# Allegro board pc049a_lemo_db_07.brd
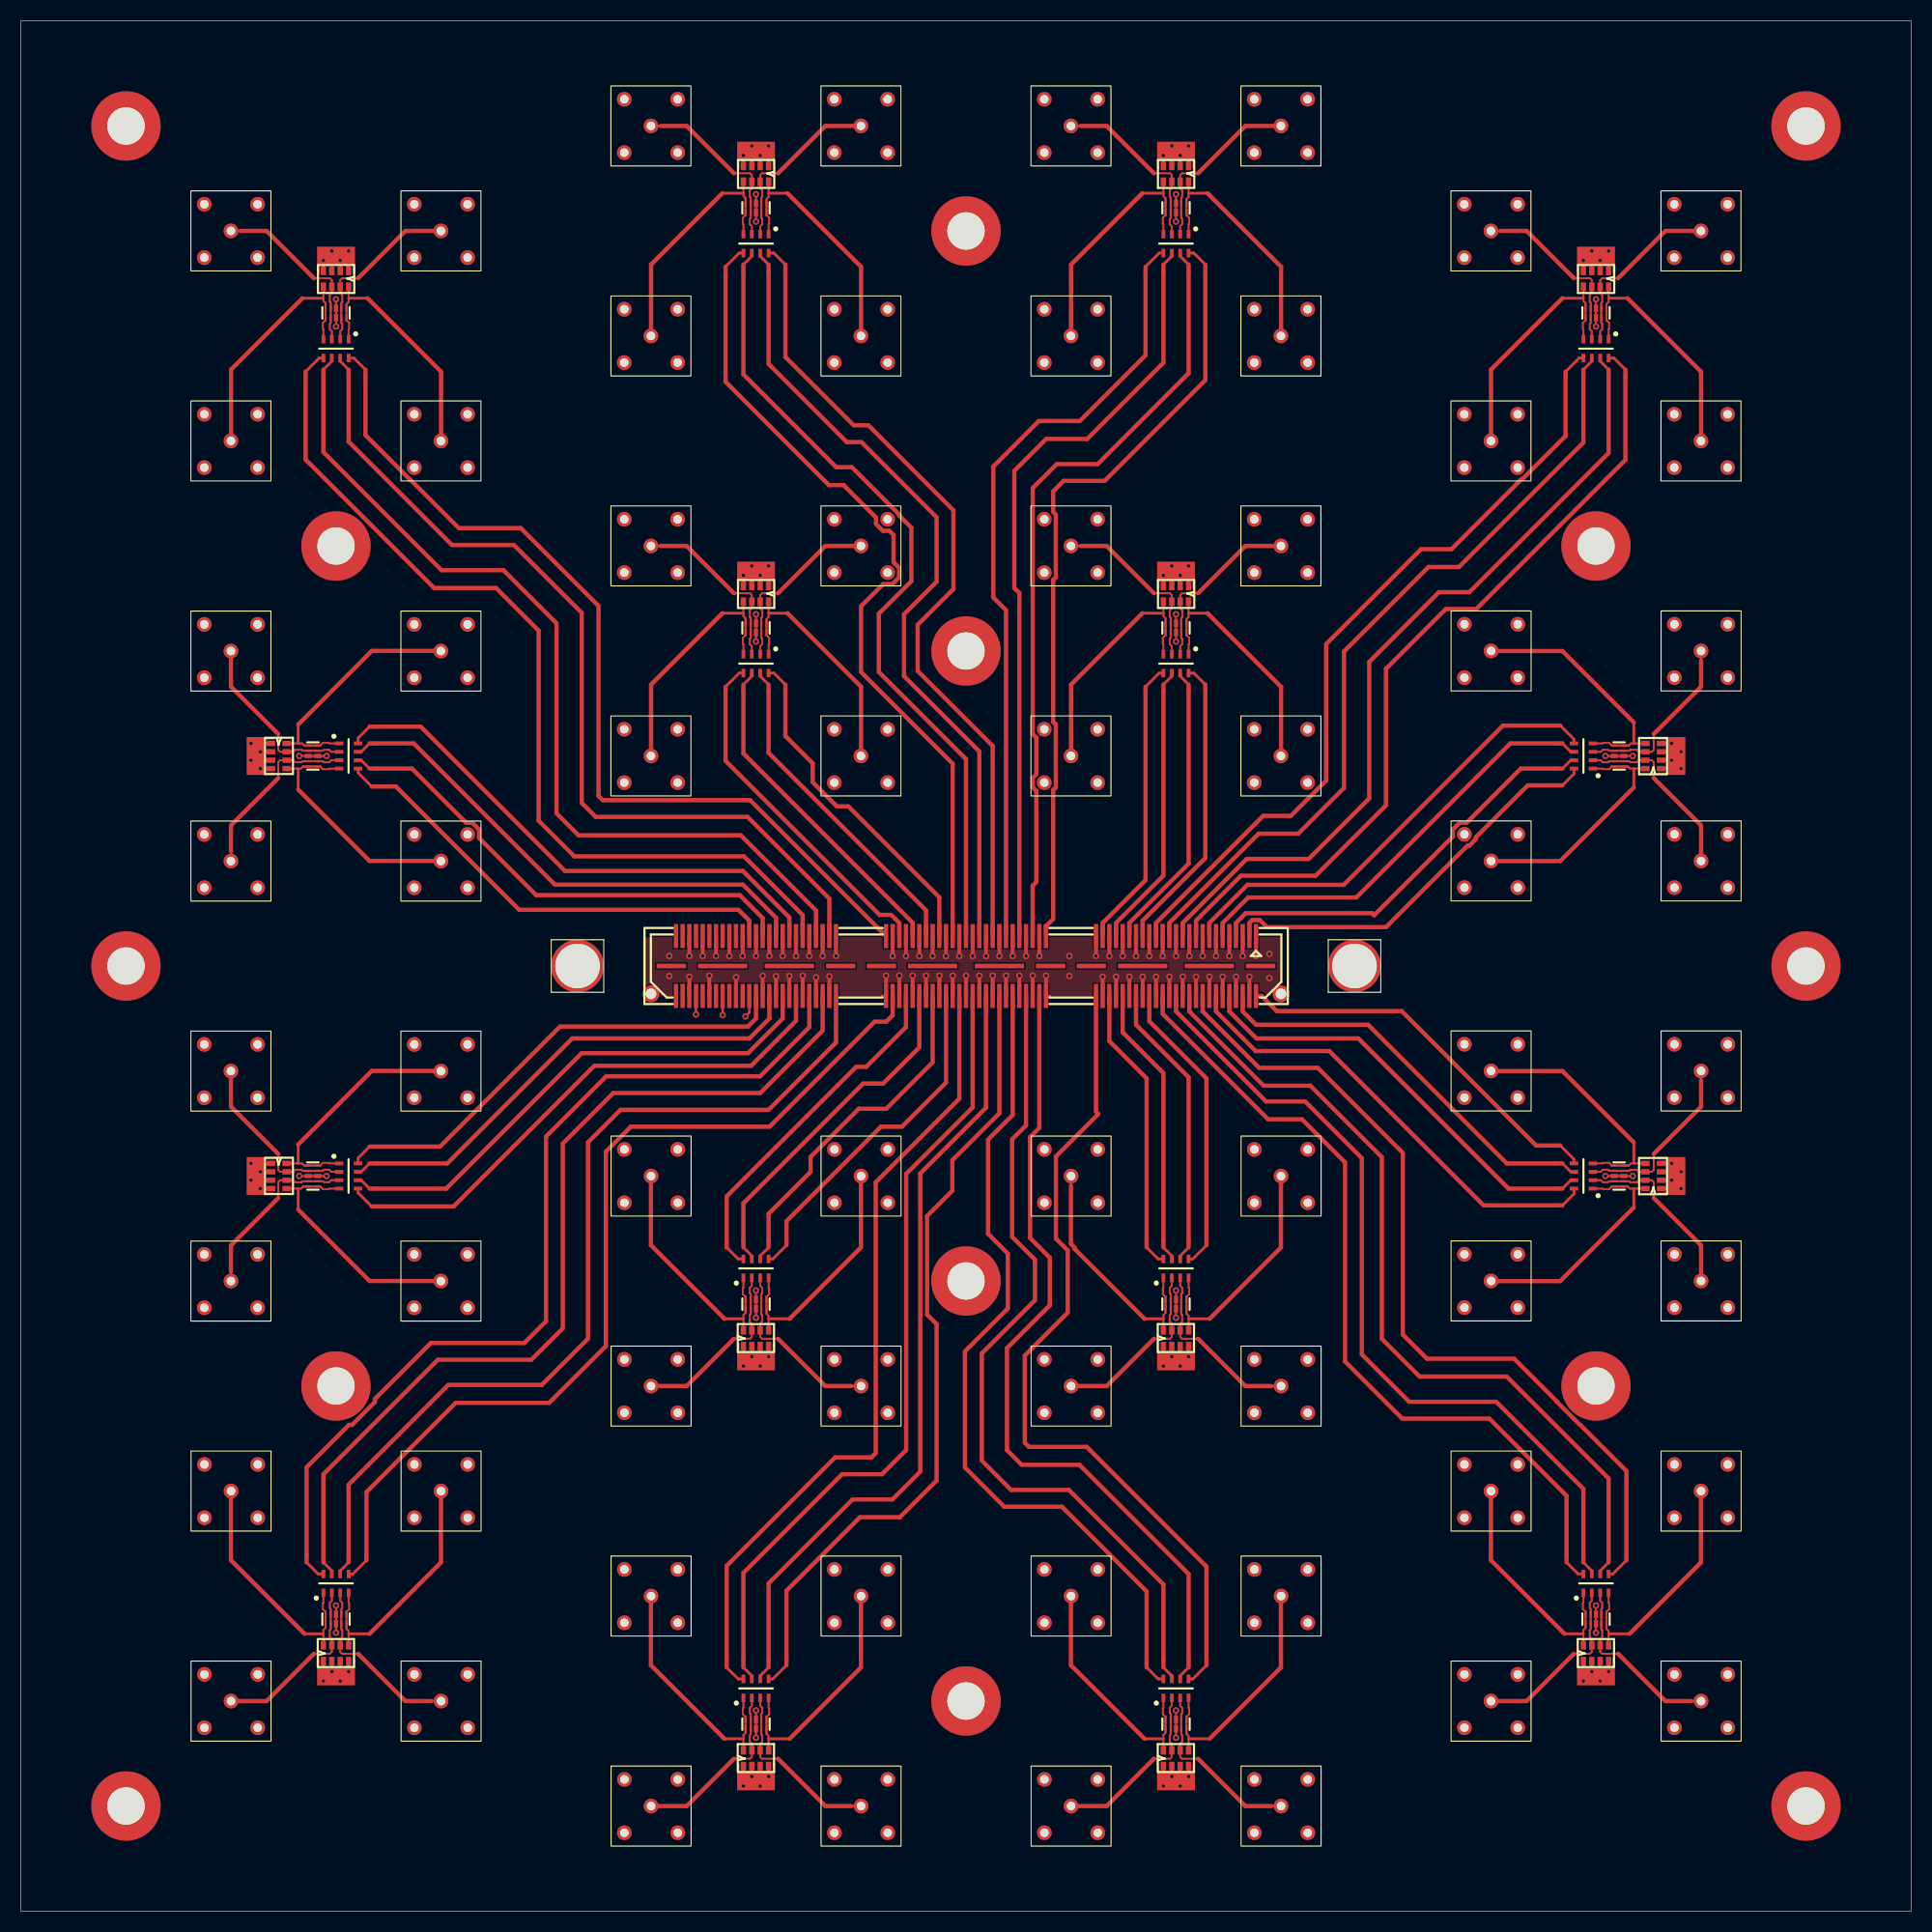
[diagram p0: board, top side]
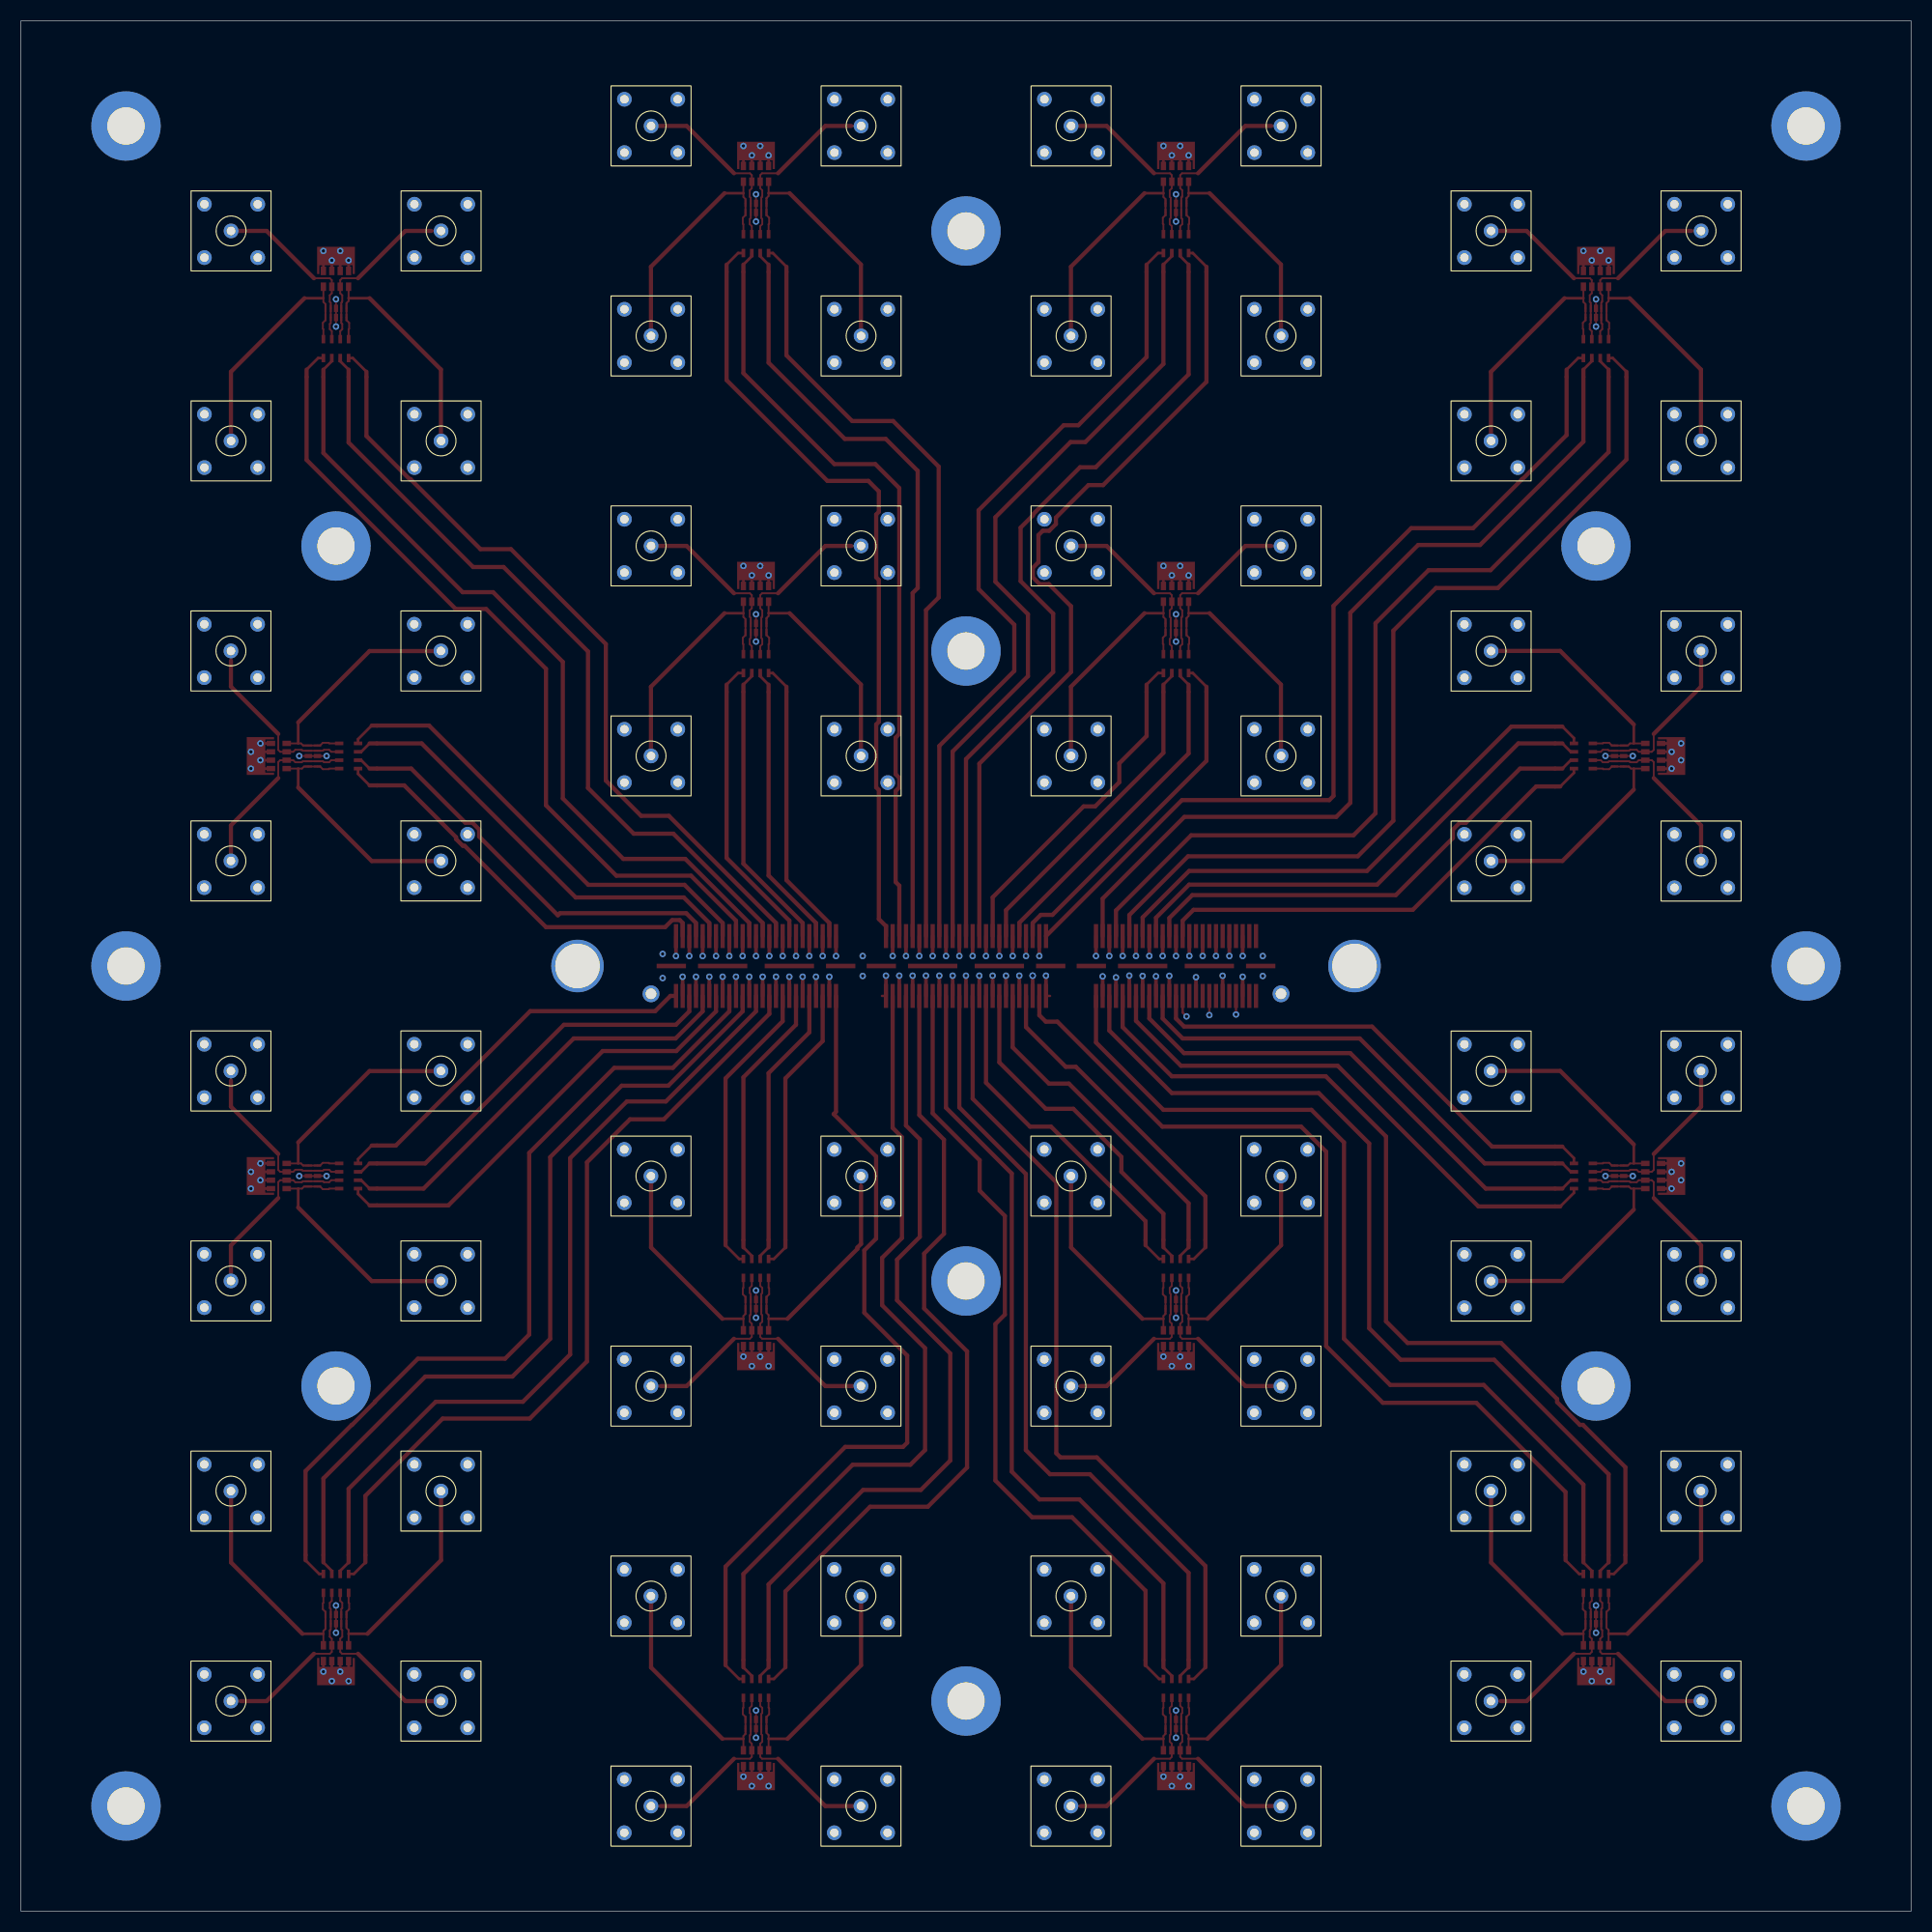
[diagram p1: board, bottom side, seen from below]

Outline 180 x 180 mm; copper layers: TOP, L2, L3, BOTTOM. Coordinates in mm from the lower left corner of the outline.
Outline path: 0,180 180,180 180,0 0,0 0,180

## Design rules (mm)
net group ANALOG_TO_MAROC: nets ANALOG_TO_MAROC<0> ANALOG_TO_MAROC<1> ANALOG_TO_MAROC<2> ANALOG_TO_MAROC<3> ANALOG_TO_MAROC<4> ANALOG_TO_MAROC<5> ANALOG_TO_MAROC<6> ANALOG_TO_MAROC<7> ANALOG_TO_MAROC<8> ANALOG_TO_MAROC<9> ANALOG_TO_MAROC<10> ANALOG_TO_MAROC<11> ANALOG_TO_MAROC<12> ANALOG_TO_MAROC<13> ANALOG_TO_MAROC<14> ANALOG_TO_MAROC<15> ANALOG_TO_MAROC<16> ANALOG_TO_MAROC<17> ANALOG_TO_MAROC<18> ANALOG_TO_MAROC<19> ANALOG_TO_MAROC<20> ANALOG_TO_MAROC<21> ANALOG_TO_MAROC<22> ANALOG_TO_MAROC<23> ANALOG_TO_MAROC<24> ANALOG_TO_MAROC<25> ANALOG_TO_MAROC<26> ANALOG_TO_MAROC<27> ANALOG_TO_MAROC<28> ANALOG_TO_MAROC<29> ANALOG_TO_MAROC<30> ANALOG_TO_MAROC<31> ANALOG_TO_MAROC<32> ANALOG_TO_MAROC<33> ANALOG_TO_MAROC<34> ANALOG_TO_MAROC<35> ANALOG_TO_MAROC<36> ANALOG_TO_MAROC<37> ANALOG_TO_MAROC<38> ANALOG_TO_MAROC<39> ANALOG_TO_MAROC<40> ANALOG_TO_MAROC<41> ANALOG_TO_MAROC<42> ANALOG_TO_MAROC<43> ANALOG_TO_MAROC<44> ANALOG_TO_MAROC<45> ANALOG_TO_MAROC<46> ANALOG_TO_MAROC<47> ANALOG_TO_MAROC<48> ANALOG_TO_MAROC<49> ANALOG_TO_MAROC<50> ANALOG_TO_MAROC<51> ANALOG_TO_MAROC<52> ANALOG_TO_MAROC<53> ANALOG_TO_MAROC<54> ANALOG_TO_MAROC<55> ANALOG_TO_MAROC<56> ANALOG_TO_MAROC<57> ANALOG_TO_MAROC<58> ANALOG_TO_MAROC<59> ANALOG_TO_MAROC<60> ANALOG_TO_MAROC<61> ANALOG_TO_MAROC<62> ANALOG_TO_MAROC<63>

## Placement (name value [footprint] x y rotation side)
CN1_1  100nF/16V  [CAPCAF80P160X320X110-8N]  31.2 70 0 top
CN1_2  100nF/16V  [CAPCAF80P160X320X110-8N]  30 31.2 90 top
CN1_3  100nF/16V  [CAPCAF80P160X320X110-8N]  70 61.2 90 top
CN1_4  100nF/16V  [CAPCAF80P160X320X110-8N]  70 21.2 90 top
CN1_5  100nF/16V  [CAPCAF80P160X320X110-8N]  110 21.2 90 top
CN1_6  100nF/16V  [CAPCAF80P160X320X110-8N]  110 61.2 90 top
CN1_7  100nF/16V  [CAPCAF80P160X320X110-8N]  148.8 70 180 top
CN1_8  100nF/16V  [CAPCAF80P160X320X110-8N]  150 31.2 90 top
CN1_9  100nF/16V  [CAPCAF80P160X320X110-8N]  148.8 110 180 top
CN1_10  100nF/16V  [CAPCAF80P160X320X110-8N]  150 148.8 270 top
CN1_11  100nF/16V  [CAPCAF80P160X320X110-8N]  110 158.8 270 top
CN1_12  100nF/16V  [CAPCAF80P160X320X110-8N]  110 118.8 270 top
CN1_13  100nF/16V  [CAPCAF80P160X320X110-8N]  70 158.8 270 top
CN1_14  100nF/16V  [CAPCAF80P160X320X110-8N]  70 118.8 270 top
CN1_15  100nF/16V  [CAPCAF80P160X320X110-8N]  31.2 110 0 top
CN1_16  100nF/16V  [CAPCAF80P160X320X110-8N]  30 148.8 270 top
D1_1  -  [DIO_LITTELFUSE_SP3010]  27.8 70 90 top
D1_2  -  [DIO_LITTELFUSE_SP3010]  30 27.8 180 top
D1_3  -  [DIO_LITTELFUSE_SP3010]  70 57.8 180 top
D1_4  -  [DIO_LITTELFUSE_SP3010]  70 17.8 180 top
D1_5  -  [DIO_LITTELFUSE_SP3010]  110 17.8 180 top
D1_6  -  [DIO_LITTELFUSE_SP3010]  110 57.8 180 top
D1_7  -  [DIO_LITTELFUSE_SP3010]  152.2 70 270 top
D1_8  -  [DIO_LITTELFUSE_SP3010]  150 27.8 180 top
D1_9  -  [DIO_LITTELFUSE_SP3010]  152.2 110 270 top
D1_10  -  [DIO_LITTELFUSE_SP3010]  150 152.2 0 top
D1_11  -  [DIO_LITTELFUSE_SP3010]  110 162.2 0 top
D1_12  -  [DIO_LITTELFUSE_SP3010]  110 122.2 0 top
D1_13  -  [DIO_LITTELFUSE_SP3010]  70 162.2 0 top
D1_14  -  [DIO_LITTELFUSE_SP3010]  70 122.2 0 top
D1_15  -  [DIO_LITTELFUSE_SP3010]  27.8 110 90 top
D1_16  -  [DIO_LITTELFUSE_SP3010]  30 152.2 0 top
J1  -  [CON150_QSSDA]  117.62 92.85 270 top
LK*  -  [unnamed#2]  53 90 0 top
LK*#2  -  [unnamed#2]  127 90 0 top
NOREF  -  [unnamed]  170 10 0 top
NOREF#2  -  [unnamed]  10 90 0 top
NOREF#3  -  [unnamed]  30 50 0 top
NOREF#4  -  [unnamed]  90 60 0 top
NOREF#5  -  [#3]  0 0 90 top
NOREF#6  -  [unnamed]  10 170 0 top
NOREF#7  -  [unnamed]  90 160 0 top
NOREF#8  -  [unnamed]  150 50 0 top
NOREF#9  -  [unnamed]  150 130 0 top
NOREF#10  -  [unnamed]  170 90 0 top
NOREF#11  -  [unnamed]  170 170 0 top
NOREF#12  -  [#3]  -130 -130 0 top
NOREF#13  -  [#3]  0 180 0 top
NOREF#14  -  [unnamed]  10 10 0 top
NOREF#15  -  [unnamed]  90 120 0 top
NOREF#16  -  [unnamed]  90 20 0 top
NOREF#17  -  [unnamed]  30 130 0 top
PX1_1  -  [PLEMOD80]  40 60 270 bottom
PX1_2  -  [PLEMOD80]  40 40 0 bottom
PX1_3  -  [PLEMOD80]  80 70 0 bottom
PX1_4  -  [PLEMOD80]  80 30 0 bottom
PX1_5  -  [PLEMOD80]  120 30 0 bottom
PX1_6  -  [PLEMOD80]  120 70 0 bottom
PX1_7  -  [PLEMOD80]  140 80 90 bottom
PX1_8  -  [PLEMOD80]  160 40 0 bottom
PX1_9  -  [PLEMOD80]  140 120 90 bottom
PX1_10  -  [PLEMOD80]  140 140 180 bottom
PX1_11  -  [PLEMOD80]  100 150 180 bottom
PX1_12  -  [PLEMOD80]  100 110 180 bottom
PX1_13  -  [PLEMOD80]  60 150 180 bottom
PX1_14  -  [PLEMOD80]  60 110 180 bottom
PX1_15  -  [PLEMOD80]  40 100 270 bottom
PX1_16  -  [PLEMOD80]  20 140 180 bottom
PX2_1  -  [PLEMOD80]  20 60 270 bottom
PX2_2  -  [PLEMOD80]  40 20 0 bottom
PX2_3  -  [PLEMOD80]  80 50 0 bottom
PX2_4  -  [PLEMOD80]  80 10 0 bottom
PX2_5  -  [PLEMOD80]  120 10 0 bottom
PX2_6  -  [PLEMOD80]  120 50 0 bottom
PX2_7  -  [PLEMOD80]  160 80 90 bottom
PX2_8  -  [PLEMOD80]  160 20 0 bottom
PX2_9  -  [PLEMOD80]  160 120 90 bottom
PX2_10  -  [PLEMOD80]  140 160 180 bottom
PX2_11  -  [PLEMOD80]  100 170 180 bottom
PX2_12  -  [PLEMOD80]  100 130 180 bottom
PX2_13  -  [PLEMOD80]  60 170 180 bottom
PX2_14  -  [PLEMOD80]  60 130 180 bottom
PX2_15  -  [PLEMOD80]  20 100 270 bottom
PX2_16  -  [PLEMOD80]  20 160 180 bottom
PX3_1  -  [PLEMOD80]  20 80 270 bottom
PX3_2  -  [PLEMOD80]  20 20 0 bottom
PX3_3  -  [PLEMOD80]  60 50 0 bottom
PX3_4  -  [PLEMOD80]  60 10 0 bottom
PX3_5  -  [PLEMOD80]  100 10 0 bottom
PX3_6  -  [PLEMOD80]  100 50 0 bottom
PX3_7  -  [PLEMOD80]  160 60 90 bottom
PX3_8  -  [PLEMOD80]  140 20 0 bottom
PX3_9  -  [PLEMOD80]  160 100 90 bottom
PX3_10  -  [PLEMOD80]  160 160 180 bottom
PX3_11  -  [PLEMOD80]  120 170 180 bottom
PX3_12  -  [PLEMOD80]  120 130 180 bottom
PX3_13  -  [PLEMOD80]  80 170 180 bottom
PX3_14  -  [PLEMOD80]  80 130 180 bottom
PX3_15  -  [PLEMOD80]  20 120 270 bottom
PX3_16  -  [PLEMOD80]  40 160 180 bottom
PX4_1  -  [PLEMOD80]  40 80 270 bottom
PX4_2  -  [PLEMOD80]  20 40 0 bottom
PX4_3  -  [PLEMOD80]  60 70 0 bottom
PX4_4  -  [PLEMOD80]  60 30 0 bottom
PX4_5  -  [PLEMOD80]  100 30 0 bottom
PX4_6  -  [PLEMOD80]  100 70 0 bottom
PX4_7  -  [PLEMOD80]  140 60 90 bottom
PX4_8  -  [PLEMOD80]  140 40 0 bottom
PX4_9  -  [PLEMOD80]  140 100 90 bottom
PX4_10  -  [PLEMOD80]  160 140 180 bottom
PX4_11  -  [PLEMOD80]  120 150 180 bottom
PX4_12  -  [PLEMOD80]  120 110 180 bottom
PX4_13  -  [PLEMOD80]  80 150 180 bottom
PX4_14  -  [PLEMOD80]  80 110 180 bottom
PX4_15  -  [PLEMOD80]  40 120 270 bottom
PX4_16  -  [PLEMOD80]  40 140 180 bottom
RZ1_1  180  [ARC241_SO8]  23.8 71.2 270 top
RZ1_2  180  [ARC241_SO8]  28.8 23.8 0 top
RZ1_3  180  [ARC241_SO8]  68.8 53.8 0 top
RZ1_4  180  [ARC241_SO8]  68.8 13.8 0 top
RZ1_5  180  [ARC241_SO8]  108.8 13.8 0 top
RZ1_6  180  [ARC241_SO8]  108.8 53.8 0 top
RZ1_7  180  [ARC241_SO8]  156.2 68.8 90 top
RZ1_8  180  [ARC241_SO8]  148.8 23.8 0 top
RZ1_9  180  [ARC241_SO8]  156.2 108.8 90 top
RZ1_10  180  [ARC241_SO8]  151.2 156.2 180 top
RZ1_11  180  [ARC241_SO8]  111.2 166.2 180 top
RZ1_12  180  [ARC241_SO8]  111.2 126.2 180 top
RZ1_13  180  [ARC241_SO8]  71.2 166.2 180 top
RZ1_14  180  [ARC241_SO8]  71.2 126.2 180 top
RZ1_15  180  [ARC241_SO8]  23.8 111.2 270 top
RZ1_16  180  [ARC241_SO8]  31.2 156.2 180 top

## Library data of the parts
CN1_1-CN1_16 = CAPN4I: part number: CAPN4I-100NF,16V,X7R,CKCA43
D1_1-D1_16 = TVS_DIODE_ARRAY_SP3010: part number: TVS_DIODE_ARRAY_SP3010_UDFN-SP3010-04UTG
J1 = CON150P: part number: CON150P-QSS75_01FDA
PX1_1-PX1_16 PX2_1-PX2_16 PX3_1-PX3_16 PX4_1-PX4_16 = COAX: part number: COAX-PLEMO00D
RZ1_1-RZ1_16 = R4ISMD: part number: R4ISMD_1206-180

## Footprints (pads in the part's own frame, mm; a bottom-side part is the same pattern mirrored in y, then rotated)
ARC241_SO8
  rect 0.508x0.813 smd: 1(0,0) 2(0.8,0) 3(1.6,0) 4(2.4,0) 5(2.4,1.505) 6(1.6,1.505) 7(0.8,1.505) 8(0,1.505)
CAPCAF80P160X320X110-8N
  rect 0.8x0.35 smd: 1(-0.9,1.2) 2(0.9,1.2) 3(-0.9,0.4) 4(0.9,0.4) 5(-0.9,-0.4) 6(0.9,-0.4) 7(-0.9,-1.2) 8(0.9,-1.2)
CON150_QSSDA
  round 1.6 hole 1.016: (5.5,2.38) (5.5,-57.62)
  rect 2.286x0.406 smd: 1(0,0) 2(5.7,0) 3(0,-0.635) 4(5.7,-0.635) 5(0,-1.27) 6(5.7,-1.27) 7(0,-1.905) 8(5.7,-1.905) 9(0,-2.54) 10(5.7,-2.54) 11(0,-3.175) 12(5.7,-3.175) 13(0,-3.81) 14(5.7,-3.81) 15(0,-4.445) 16(5.7,-4.445) 17(0,-5.08) 18(5.7,-5.08) 19(0,-5.715) 20(5.7,-5.715) 21(0,-6.35) 22(5.7,-6.35) 23(0,-6.985) 24(5.7,-6.985) 25(0,-7.62) 26(5.7,-7.62) 27(0,-8.255) 28(5.7,-8.255) 29(0,-8.89) 30(5.7,-8.89) 31(0,-9.525) 32(5.7,-9.525) 33(0,-10.16) 34(5.7,-10.16) 35(0,-10.795) 36(5.7,-10.795) 37(0,-11.43) 38(5.7,-11.43) 39(0,-12.065) 40(5.7,-12.065) 41(0,-12.7) 42(5.7,-12.7) 43(0,-13.335) 44(5.7,-13.335) 45(0,-13.97) 46(5.7,-13.97) 47(0,-14.605) 48(5.7,-14.605) 49(0,-15.24) 50(5.7,-15.24) 51(0,-20) 52(5.7,-20) 53(0,-20.635) 54(5.7,-20.635) 55(0,-21.27) 56(5.7,-21.27) 57(0,-21.905) 58(5.7,-21.905) 59(0,-22.54) 60(5.7,-22.54) 61(0,-23.175) 62(5.7,-23.175) 63(0,-23.81) 64(5.7,-23.81) 65(0,-24.445) 66(5.7,-24.445) 67(0,-25.08) 68(5.7,-25.08) 69(0,-25.715) 70(5.7,-25.715) 71(0,-26.35) 72(5.7,-26.35) 73(0,-26.985) 74(5.7,-26.985) 75(0,-27.62) 76(5.7,-27.62) 77(0,-28.255) 78(5.7,-28.255) 79(0,-28.89) 80(5.7,-28.89) 81(0,-29.525) 82(5.7,-29.525) 83(0,-30.16) 84(5.7,-30.16) 85(0,-30.795) 86(5.7,-30.795) 87(0,-31.43) 88(5.7,-31.43) 89(0,-32.065) 90(5.7,-32.065) 91(0,-32.7) 92(5.7,-32.7) 93(0,-33.335) 94(5.7,-33.335) 95(0,-33.97) 96(5.7,-33.97) 97(0,-34.605) 98(5.7,-34.605) 99(0,-35.24) 100(5.7,-35.24) 101(0,-40) 102(5.7,-40) 103(0,-40.635) 104(5.7,-40.635) 105(0,-41.27) 106(5.7,-41.27) 107(0,-41.905) 108(5.7,-41.905) 109(0,-42.54) 110(5.7,-42.54) 111(0,-43.175) 112(5.7,-43.175) 113(0,-43.81) 114(5.7,-43.81) 115(0,-44.445) 116(5.7,-44.445) 117(0,-45.08) 118(5.7,-45.08) 119(0,-45.715) 120(5.7,-45.715) 121(0,-46.35) 122(5.7,-46.35) 123(0,-46.985) 124(5.7,-46.985) 125(0,-47.62) 126(5.7,-47.62) 127(0,-48.255) 128(5.7,-48.255) 129(0,-48.89) 130(5.7,-48.89) 131(0,-49.525) 132(5.7,-49.525) 133(0,-50.16) 134(5.7,-50.16) 135(0,-50.795) 136(5.7,-50.795) 137(0,-51.43) 138(5.7,-51.43) 139(0,-52.065) 140(5.7,-52.065) 141(0,-52.7) 142(5.7,-52.7) 143(0,-53.335) 144(5.7,-53.335) 145(0,-53.97) 146(5.7,-53.97) 147(0,-54.605) 148(5.7,-54.605) 149(0,-55.24) 150(5.7,-55.24)
  rect 0.432x2.794 smd: 151(2.85,0.445) 154(2.85,-15.685) 155(2.85,-19.555) 158(2.85,-35.685) 159(2.85,-39.555) 162(2.85,-55.685)
  rect 0.432x4.699 smd: 152(2.85,-4.445) 153(2.85,-10.795) 156(2.85,-24.445) 157(2.85,-30.795) 160(2.85,-44.445) 161(2.85,-50.795)
DIO_LITTELFUSE_SP3010
  rect 0.2x0.7 smd: 1(1,0.437) 2(0.5,0.437) 4(-0.5,0.437) 5(-1,0.437) 6(-1,-0.438) 7(-0.5,-0.438) 9(0.5,-0.438) 10(1,-0.438)
  rect 0.4x0.7 smd: 3(0,0.437) 8(0,-0.438)
PLEMOD80
  round 1.397 hole 0.813: 1(0.006,0.007) 2(-2.534,-2.533) 3(2.546,-2.533) 4(2.546,2.547) 5(-2.534,2.547)
unnamed
  round 6.604 hole 3.556: 1(0,0)
unnamed#2
  round 5 hole 4.24 unplated: (0,0)

## Nets
AVDD: J1.147(A<146>) J1.148(A<147>) J1.149(A<148>) J1.150(A<149>)
GND_SIGNAL: D1_1.3(GND1) D1_1.8(GND2) D1_2.3(GND1) D1_2.8(GND2) D1_3.3(GND1) D1_3.8(GND2) D1_4.3(GND1) D1_4.8(GND2) D1_5.3(GND1) D1_5.8(GND2) D1_6.3(GND1) D1_6.8(GND2) D1_7.3(GND1) D1_7.8(GND2) D1_8.3(GND1) D1_8.8(GND2) D1_9.3(GND1) D1_9.8(GND2) D1_10.3(GND1) D1_10.8(GND2) D1_11.3(GND1) D1_11.8(GND2) D1_12.3(GND1) D1_12.8(GND2) D1_13.3(GND1) D1_13.8(GND2) D1_14.3(GND1) D1_14.8(GND2) D1_15.3(GND1) D1_15.8(GND2) D1_16.3(GND1) D1_16.8(GND2) J1.1(A<0>) J1.4(A<3>) J1.5(A<4>) J1.8(A<7>) J1.9(A<8>) J1.12(A<11>) J1.13(A<12>) J1.16(A<15>) J1.17(A<16>) J1.20(A<19>) J1.21(A<20>) J1.24(A<23>) J1.25(A<24>) J1.28(A<27>) J1.29(A<28>) J1.32(A<31>) J1.33(A<32>) J1.36(A<35>) J1.37(A<36>) J1.40(A<39>) J1.41(A<40>) J1.44(A<43>) J1.45(A<44>) J1.48(A<47>) J1.49(A<48>) J1.52(A<51>) J1.53(A<52>) J1.56(A<55>) J1.57(A<56>) J1.60(A<59>) J1.61(A<60>) J1.64(A<63>) J1.65(A<64>) J1.68(A<67>) J1.69(A<68>) J1.72(A<71>) J1.73(A<72>) J1.76(A<75>) J1.77(A<76>) J1.80(A<79>) J1.81(A<80>) J1.84(A<83>) J1.85(A<84>) J1.88(A<87>) J1.89(A<88>) J1.92(A<91>) J1.93(A<92>) J1.96(A<95>) J1.97(A<96>) J1.100(A<99>) J1.101(A<100>) J1.104(A<103>) J1.105(A<104>) J1.108(A<107>) J1.109(A<108>) J1.112(A<111>) J1.113(A<112>) J1.116(A<115>) J1.117(A<116>) J1.120(A<119>) J1.121(A<120>) J1.124(A<123>) J1.125(A<124>) J1.128(A<127>) J1.129(A<128>) J1.132(A<131>) J1.133(A<132>) J1.136(A<135>) J1.137(A<136>) J1.140(A<139>) J1.141(A<140>) J1.144(A<143>) J1.145(A<144>) J1.146(A<145>) PX1_1.2(B<0>) PX1_1.3(B<1>) PX1_1.4(B<2>) PX1_1.5(B<3>) PX1_2.2(B<0>) PX1_2.3(B<1>) PX1_2.4(B<2>) PX1_2.5(B<3>) PX1_3.2(B<0>) PX1_3.3(B<1>) PX1_3.4(B<2>) PX1_3.5(B<3>) PX1_4.2(B<0>) PX1_4.3(B<1>) PX1_4.4(B<2>) PX1_4.5(B<3>) PX1_5.2(B<0>) PX1_5.3(B<1>) PX1_5.4(B<2>) PX1_5.5(B<3>) PX1_6.2(B<0>) PX1_6.3(B<1>) PX1_6.4(B<2>) PX1_6.5(B<3>) PX1_7.2(B<0>) PX1_7.3(B<1>) PX1_7.4(B<2>) PX1_7.5(B<3>) PX1_8.2(B<0>) PX1_8.3(B<1>) PX1_8.4(B<2>) PX1_8.5(B<3>) PX1_9.2(B<0>) PX1_9.3(B<1>) PX1_9.4(B<2>) PX1_9.5(B<3>) PX1_10.2(B<0>) PX1_10.3(B<1>) PX1_10.4(B<2>) PX1_10.5(B<3>) PX1_11.2(B<0>) PX1_11.3(B<1>) PX1_11.4(B<2>) PX1_11.5(B<3>) PX1_12.2(B<0>) PX1_12.3(B<1>) PX1_12.4(B<2>) PX1_12.5(B<3>) PX1_13.2(B<0>) PX1_13.3(B<1>) PX1_13.4(B<2>) PX1_13.5(B<3>) PX1_14.2(B<0>) PX1_14.3(B<1>) PX1_14.4(B<2>) PX1_14.5(B<3>) PX1_15.2(B<0>) PX1_15.3(B<1>) PX1_15.4(B<2>) PX1_15.5(B<3>) PX1_16.2(B<0>) PX1_16.3(B<1>) PX1_16.4(B<2>) PX1_16.5(B<3>) PX2_1.2(B<0>) PX2_1.3(B<1>) PX2_1.4(B<2>) PX2_1.5(B<3>) PX2_2.2(B<0>) PX2_2.3(B<1>) PX2_2.4(B<2>) PX2_2.5(B<3>) PX2_3.2(B<0>) PX2_3.3(B<1>) PX2_3.4(B<2>) PX2_3.5(B<3>) PX2_4.2(B<0>) PX2_4.3(B<1>) PX2_4.4(B<2>) PX2_4.5(B<3>) PX2_5.2(B<0>) PX2_5.3(B<1>) PX2_5.4(B<2>) PX2_5.5(B<3>) PX2_6.2(B<0>) PX2_6.3(B<1>) PX2_6.4(B<2>) PX2_6.5(B<3>) PX2_7.2(B<0>) PX2_7.3(B<1>) PX2_7.4(B<2>) PX2_7.5(B<3>) PX2_8.2(B<0>) PX2_8.3(B<1>) PX2_8.4(B<2>) PX2_8.5(B<3>) PX2_9.2(B<0>) PX2_9.3(B<1>) PX2_9.4(B<2>) PX2_9.5(B<3>) PX2_10.2(B<0>) PX2_10.3(B<1>) PX2_10.4(B<2>) PX2_10.5(B<3>) PX2_11.2(B<0>) PX2_11.3(B<1>) PX2_11.4(B<2>) PX2_11.5(B<3>) PX2_12.2(B<0>) PX2_12.3(B<1>) PX2_12.4(B<2>) PX2_12.5(B<3>) PX2_13.2(B<0>) PX2_13.3(B<1>) PX2_13.4(B<2>) PX2_13.5(B<3>) PX2_14.2(B<0>) PX2_14.3(B<1>) PX2_14.4(B<2>) PX2_14.5(B<3>) PX2_15.2(B<0>) PX2_15.3(B<1>) PX2_15.4(B<2>) PX2_15.5(B<3>) PX2_16.2(B<0>) PX2_16.3(B<1>) PX2_16.4(B<2>) PX2_16.5(B<3>) PX3_1.2(B<0>) PX3_1.3(B<1>) PX3_1.4(B<2>) PX3_1.5(B<3>) PX3_2.2(B<0>) PX3_2.3(B<1>) PX3_2.4(B<2>) PX3_2.5(B<3>) PX3_3.2(B<0>) PX3_3.3(B<1>) PX3_3.4(B<2>) PX3_3.5(B<3>) PX3_4.2(B<0>) PX3_4.3(B<1>) PX3_4.4(B<2>) PX3_4.5(B<3>) PX3_5.2(B<0>) PX3_5.3(B<1>) PX3_5.4(B<2>) PX3_5.5(B<3>) PX3_6.2(B<0>) PX3_6.3(B<1>) PX3_6.4(B<2>) PX3_6.5(B<3>) PX3_7.2(B<0>) PX3_7.3(B<1>) PX3_7.4(B<2>) PX3_7.5(B<3>) PX3_8.2(B<0>) PX3_8.3(B<1>) PX3_8.4(B<2>) PX3_8.5(B<3>) PX3_9.2(B<0>) PX3_9.3(B<1>) PX3_9.4(B<2>) PX3_9.5(B<3>) PX3_10.2(B<0>) PX3_10.3(B<1>) PX3_10.4(B<2>) PX3_10.5(B<3>) PX3_11.2(B<0>) PX3_11.3(B<1>) PX3_11.4(B<2>) PX3_11.5(B<3>) PX3_12.2(B<0>) PX3_12.3(B<1>) PX3_12.4(B<2>) PX3_12.5(B<3>) PX3_13.2(B<0>) PX3_13.3(B<1>) PX3_13.4(B<2>) PX3_13.5(B<3>) PX3_14.2(B<0>) PX3_14.3(B<1>) PX3_14.4(B<2>) PX3_14.5(B<3>) PX3_15.2(B<0>) PX3_15.3(B<1>) PX3_15.4(B<2>) PX3_15.5(B<3>) PX3_16.2(B<0>) PX3_16.3(B<1>) PX3_16.4(B<2>) PX3_16.5(B<3>) PX4_1.2(B<0>) PX4_1.3(B<1>) PX4_1.4(B<2>) PX4_1.5(B<3>) PX4_2.2(B<0>) PX4_2.3(B<1>) PX4_2.4(B<2>) PX4_2.5(B<3>) PX4_3.2(B<0>) PX4_3.3(B<1>) PX4_3.4(B<2>) PX4_3.5(B<3>) PX4_4.2(B<0>) PX4_4.3(B<1>) PX4_4.4(B<2>) PX4_4.5(B<3>) PX4_5.2(B<0>) PX4_5.3(B<1>) PX4_5.4(B<2>) PX4_5.5(B<3>) PX4_6.2(B<0>) PX4_6.3(B<1>) PX4_6.4(B<2>) PX4_6.5(B<3>) PX4_7.2(B<0>) PX4_7.3(B<1>) PX4_7.4(B<2>) PX4_7.5(B<3>) PX4_8.2(B<0>) PX4_8.3(B<1>) PX4_8.4(B<2>) PX4_8.5(B<3>) PX4_9.2(B<0>) PX4_9.3(B<1>) PX4_9.4(B<2>) PX4_9.5(B<3>) PX4_10.2(B<0>) PX4_10.3(B<1>) PX4_10.4(B<2>) PX4_10.5(B<3>) PX4_11.2(B<0>) PX4_11.3(B<1>) PX4_11.4(B<2>) PX4_11.5(B<3>) PX4_12.2(B<0>) PX4_12.3(B<1>) PX4_12.4(B<2>) PX4_12.5(B<3>) PX4_13.2(B<0>) PX4_13.3(B<1>) PX4_13.4(B<2>) PX4_13.5(B<3>) PX4_14.2(B<0>) PX4_14.3(B<1>) PX4_14.4(B<2>) PX4_14.5(B<3>) PX4_15.2(B<0>) PX4_15.3(B<1>) PX4_15.4(B<2>) PX4_15.5(B<3>) PX4_16.2(B<0>) PX4_16.3(B<1>) PX4_16.4(B<2>) PX4_16.5(B<3>) RZ1_1.1(A<0>) RZ1_1.2(A<0>) RZ1_1.3(A<0>) RZ1_1.4(A<0>) RZ1_2.1(A<0>) RZ1_2.2(A<0>) RZ1_2.3(A<0>) RZ1_2.4(A<0>) RZ1_3.1(A<0>) RZ1_3.2(A<0>) RZ1_3.3(A<0>) RZ1_3.4(A<0>) RZ1_4.1(A<0>) RZ1_4.2(A<0>) RZ1_4.3(A<0>) RZ1_4.4(A<0>) RZ1_5.1(A<0>) RZ1_5.2(A<0>) RZ1_5.3(A<0>) RZ1_5.4(A<0>) RZ1_6.1(A<0>) RZ1_6.2(A<0>) RZ1_6.3(A<0>) RZ1_6.4(A<0>) RZ1_7.1(A<0>) RZ1_7.2(A<0>) RZ1_7.3(A<0>) RZ1_7.4(A<0>) RZ1_8.1(A<0>) RZ1_8.2(A<0>) RZ1_8.3(A<0>) RZ1_8.4(A<0>) RZ1_9.1(A<0>) RZ1_9.2(A<0>) RZ1_9.3(A<0>) RZ1_9.4(A<0>) RZ1_10.1(A<0>) RZ1_10.2(A<0>) RZ1_10.3(A<0>) RZ1_10.4(A<0>) RZ1_11.1(A<0>) RZ1_11.2(A<0>) RZ1_11.3(A<0>) RZ1_11.4(A<0>) RZ1_12.1(A<0>) RZ1_12.2(A<0>) RZ1_12.3(A<0>) RZ1_12.4(A<0>) RZ1_13.1(A<0>) RZ1_13.2(A<0>) RZ1_13.3(A<0>) RZ1_13.4(A<0>) RZ1_14.1(A<0>) RZ1_14.2(A<0>) RZ1_14.3(A<0>) RZ1_14.4(A<0>) RZ1_15.1(A<0>) RZ1_15.2(A<0>) RZ1_15.3(A<0>) RZ1_15.4(A<0>) RZ1_16.1(A<0>) RZ1_16.2(A<0>) RZ1_16.3(A<0>) RZ1_16.4(A<0>)
ANALOG_TO_MAROC<0>: CN1_7.8(B<0>) J1.2(A<1>)
ANALOG_TO_MAROC<1>: CN1_9.2(B<0>) J1.3(A<2>)
ANALOG_TO_MAROC<2>: CN1_7.6(B<0>) J1.6(A<5>)
ANALOG_TO_MAROC<3>: CN1_9.4(B<0>) J1.7(A<6>)
ANALOG_TO_MAROC<4>: CN1_7.4(B<0>) J1.10(A<9>)
ANALOG_TO_MAROC<5>: CN1_9.6(B<0>) J1.11(A<10>)
ANALOG_TO_MAROC<6>: CN1_7.2(B<0>) J1.14(A<13>)
ANALOG_TO_MAROC<7>: CN1_9.8(B<0>) J1.15(A<14>)
ANALOG_TO_MAROC<8>: CN1_8.8(B<0>) J1.18(A<17>)
ANALOG_TO_MAROC<9>: CN1_10.2(B<0>) J1.19(A<18>)
ANALOG_TO_MAROC<10>: CN1_8.6(B<0>) J1.22(A<21>)
ANALOG_TO_MAROC<11>: CN1_10.4(B<0>) J1.23(A<22>)
ANALOG_TO_MAROC<12>: CN1_8.4(B<0>) J1.26(A<25>)
ANALOG_TO_MAROC<13>: CN1_10.6(B<0>) J1.27(A<26>)
ANALOG_TO_MAROC<14>: CN1_8.2(B<0>) J1.30(A<29>)
ANALOG_TO_MAROC<15>: CN1_10.8(B<0>) J1.31(A<30>)
ANALOG_TO_MAROC<16>: CN1_6.8(B<0>) J1.34(A<33>)
ANALOG_TO_MAROC<17>: CN1_12.2(B<0>) J1.35(A<34>)
ANALOG_TO_MAROC<18>: CN1_6.6(B<0>) J1.38(A<37>)
ANALOG_TO_MAROC<19>: CN1_12.4(B<0>) J1.39(A<38>)
ANALOG_TO_MAROC<20>: CN1_6.4(B<0>) J1.42(A<41>)
ANALOG_TO_MAROC<21>: CN1_12.6(B<0>) J1.43(A<42>)
ANALOG_TO_MAROC<22>: CN1_6.2(B<0>) J1.46(A<45>)
ANALOG_TO_MAROC<23>: CN1_12.8(B<0>) J1.47(A<46>)
ANALOG_TO_MAROC<24>: CN1_5.8(B<0>) J1.50(A<49>)
ANALOG_TO_MAROC<25>: CN1_11.2(B<0>) J1.51(A<50>)
ANALOG_TO_MAROC<26>: CN1_5.6(B<0>) J1.54(A<53>)
ANALOG_TO_MAROC<27>: CN1_11.4(B<0>) J1.55(A<54>)
ANALOG_TO_MAROC<28>: CN1_5.4(B<0>) J1.58(A<57>)
ANALOG_TO_MAROC<29>: CN1_11.6(B<0>) J1.59(A<58>)
ANALOG_TO_MAROC<30>: CN1_5.2(B<0>) J1.62(A<61>)
ANALOG_TO_MAROC<31>: CN1_11.8(B<0>) J1.63(A<62>)
ANALOG_TO_MAROC<32>: CN1_4.8(B<0>) J1.66(A<65>)
ANALOG_TO_MAROC<33>: CN1_13.2(B<0>) J1.67(A<66>)
ANALOG_TO_MAROC<34>: CN1_4.6(B<0>) J1.70(A<69>)
ANALOG_TO_MAROC<35>: CN1_13.4(B<0>) J1.71(A<70>)
ANALOG_TO_MAROC<36>: CN1_4.4(B<0>) J1.74(A<73>)
ANALOG_TO_MAROC<37>: CN1_13.6(B<0>) J1.75(A<74>)
ANALOG_TO_MAROC<38>: CN1_4.2(B<0>) J1.78(A<77>)
ANALOG_TO_MAROC<39>: CN1_13.8(B<0>) J1.79(A<78>)
ANALOG_TO_MAROC<40>: CN1_3.8(B<0>) J1.82(A<81>)
ANALOG_TO_MAROC<41>: CN1_14.2(B<0>) J1.83(A<82>)
ANALOG_TO_MAROC<42>: CN1_3.6(B<0>) J1.86(A<85>)
ANALOG_TO_MAROC<43>: CN1_14.4(B<0>) J1.87(A<86>)
ANALOG_TO_MAROC<44>: CN1_3.4(B<0>) J1.90(A<89>)
ANALOG_TO_MAROC<45>: CN1_14.6(B<0>) J1.91(A<90>)
ANALOG_TO_MAROC<46>: CN1_3.2(B<0>) J1.94(A<93>)
ANALOG_TO_MAROC<47>: CN1_14.8(B<0>) J1.95(A<94>)
ANALOG_TO_MAROC<48>: CN1_2.8(B<0>) J1.98(A<97>)
ANALOG_TO_MAROC<49>: CN1_16.2(B<0>) J1.99(A<98>)
ANALOG_TO_MAROC<50>: CN1_2.6(B<0>) J1.102(A<101>)
ANALOG_TO_MAROC<51>: CN1_16.4(B<0>) J1.103(A<102>)
ANALOG_TO_MAROC<52>: CN1_2.4(B<0>) J1.106(A<105>)
ANALOG_TO_MAROC<53>: CN1_16.6(B<0>) J1.107(A<106>)
ANALOG_TO_MAROC<54>: CN1_2.2(B<0>) J1.110(A<109>)
ANALOG_TO_MAROC<55>: CN1_16.8(B<0>) J1.111(A<110>)
ANALOG_TO_MAROC<56>: CN1_1.8(B<0>) J1.114(A<113>)
ANALOG_TO_MAROC<57>: CN1_15.2(B<0>) J1.115(A<114>)
ANALOG_TO_MAROC<58>: CN1_1.6(B<0>) J1.118(A<117>)
ANALOG_TO_MAROC<59>: CN1_15.4(B<0>) J1.119(A<118>)
ANALOG_TO_MAROC<60>: CN1_1.4(B<0>) J1.122(A<121>)
ANALOG_TO_MAROC<61>: CN1_15.6(B<0>) J1.123(A<122>)
ANALOG_TO_MAROC<62>: CN1_1.2(B<0>) J1.126(A<125>)
ANALOG_TO_MAROC<63>: CN1_15.8(B<0>) J1.127(A<126>)
DBOARD_MISO: J1.131(A<130>)
DBOARD_MISO*: J1.135(A<134>)
DBOARD_MOSI: J1.138(A<137>)
DBOARD_MOSI*: J1.142(A<141>)
DBOARD_SCLK: J1.130(A<129>)
DBOARD_SCLK*: J1.134(A<133>)
DBOARD_SSN: J1.139(A<138>)
DBOARD_SSN*: J1.143(A<142>)
P1: J1.151 J1.152 J1.153 J1.154
P2: J1.155 J1.156 J1.157 J1.158
P3: J1.159 J1.160 J1.161 J1.162
UNNAMED_1_CAPN4I_I10_A_1: CN1_1.1(A<0>) D1_1.1(A1) D1_1.10(B1) PX4_1.1(A) RZ1_1.8(B<0>)
UNNAMED_1_CAPN4I_I10_A_1_1: CN1_1.3(A<0>) D1_1.2(A2) D1_1.9(B2) PX3_1.1(A) RZ1_1.7(B<0>)
UNNAMED_1_CAPN4I_I10_A_1_2: CN1_2.3(A<0>) D1_2.2(A2) D1_2.9(B2) PX3_2.1(A) RZ1_2.7(B<0>)
UNNAMED_1_CAPN4I_I10_A_1_3: CN1_3.3(A<0>) D1_3.2(A2) D1_3.9(B2) PX3_3.1(A) RZ1_3.7(B<0>)
UNNAMED_1_CAPN4I_I10_A_1_4: CN1_4.3(A<0>) D1_4.2(A2) D1_4.9(B2) PX3_4.1(A) RZ1_4.7(B<0>)
UNNAMED_1_CAPN4I_I10_A_1_5: CN1_5.3(A<0>) D1_5.2(A2) D1_5.9(B2) PX3_5.1(A) RZ1_5.7(B<0>)
UNNAMED_1_CAPN4I_I10_A_1_6: CN1_6.3(A<0>) D1_6.2(A2) D1_6.9(B2) PX3_6.1(A) RZ1_6.7(B<0>)
UNNAMED_1_CAPN4I_I10_A_1_7: CN1_7.3(A<0>) D1_7.2(A2) D1_7.9(B2) PX3_7.1(A) RZ1_7.7(B<0>)
UNNAMED_1_CAPN4I_I10_A_1_8: CN1_8.3(A<0>) D1_8.2(A2) D1_8.9(B2) PX3_8.1(A) RZ1_8.7(B<0>)
UNNAMED_1_CAPN4I_I10_A_1_9: CN1_9.3(A<0>) D1_9.2(A2) D1_9.9(B2) PX3_9.1(A) RZ1_9.7(B<0>)
UNNAMED_1_CAPN4I_I10_A_1_10: CN1_10.3(A<0>) D1_10.2(A2) D1_10.9(B2) PX3_10.1(A) RZ1_10.7(B<0>)
UNNAMED_1_CAPN4I_I10_A_1_11: CN1_11.3(A<0>) D1_11.2(A2) D1_11.9(B2) PX3_11.1(A) RZ1_11.7(B<0>)
UNNAMED_1_CAPN4I_I10_A_1_12: CN1_12.3(A<0>) D1_12.2(A2) D1_12.9(B2) PX3_12.1(A) RZ1_12.7(B<0>)
UNNAMED_1_CAPN4I_I10_A_1_13: CN1_13.3(A<0>) D1_13.2(A2) D1_13.9(B2) PX3_13.1(A) RZ1_13.7(B<0>)
UNNAMED_1_CAPN4I_I10_A_1_14: CN1_14.3(A<0>) D1_14.2(A2) D1_14.9(B2) PX3_14.1(A) RZ1_14.7(B<0>)
UNNAMED_1_CAPN4I_I10_A_1_15: CN1_15.3(A<0>) D1_15.2(A2) D1_15.9(B2) PX3_15.1(A) RZ1_15.7(B<0>)
UNNAMED_1_CAPN4I_I10_A_1_16: CN1_16.3(A<0>) D1_16.2(A2) D1_16.9(B2) PX3_16.1(A) RZ1_16.7(B<0>)
UNNAMED_1_CAPN4I_I10_A_2: CN1_2.1(A<0>) D1_2.1(A1) D1_2.10(B1) PX4_2.1(A) RZ1_2.8(B<0>)
UNNAMED_1_CAPN4I_I10_A_2_1: CN1_1.5(A<0>) D1_1.4(A3) D1_1.7(B3) PX2_1.1(A) RZ1_1.6(B<0>)
UNNAMED_1_CAPN4I_I10_A_2_2: CN1_2.5(A<0>) D1_2.4(A3) D1_2.7(B3) PX2_2.1(A) RZ1_2.6(B<0>)
UNNAMED_1_CAPN4I_I10_A_2_3: CN1_3.5(A<0>) D1_3.4(A3) D1_3.7(B3) PX2_3.1(A) RZ1_3.6(B<0>)
UNNAMED_1_CAPN4I_I10_A_2_4: CN1_4.5(A<0>) D1_4.4(A3) D1_4.7(B3) PX2_4.1(A) RZ1_4.6(B<0>)
UNNAMED_1_CAPN4I_I10_A_2_5: CN1_5.5(A<0>) D1_5.4(A3) D1_5.7(B3) PX2_5.1(A) RZ1_5.6(B<0>)
UNNAMED_1_CAPN4I_I10_A_2_6: CN1_6.5(A<0>) D1_6.4(A3) D1_6.7(B3) PX2_6.1(A) RZ1_6.6(B<0>)
UNNAMED_1_CAPN4I_I10_A_2_7: CN1_7.5(A<0>) D1_7.4(A3) D1_7.7(B3) PX2_7.1(A) RZ1_7.6(B<0>)
UNNAMED_1_CAPN4I_I10_A_2_8: CN1_8.5(A<0>) D1_8.4(A3) D1_8.7(B3) PX2_8.1(A) RZ1_8.6(B<0>)
UNNAMED_1_CAPN4I_I10_A_2_9: CN1_9.5(A<0>) D1_9.4(A3) D1_9.7(B3) PX2_9.1(A) RZ1_9.6(B<0>)
UNNAMED_1_CAPN4I_I10_A_2_10: CN1_10.5(A<0>) D1_10.4(A3) D1_10.7(B3) PX2_10.1(A) RZ1_10.6(B<0>)
UNNAMED_1_CAPN4I_I10_A_2_11: CN1_11.5(A<0>) D1_11.4(A3) D1_11.7(B3) PX2_11.1(A) RZ1_11.6(B<0>)
UNNAMED_1_CAPN4I_I10_A_2_12: CN1_12.5(A<0>) D1_12.4(A3) D1_12.7(B3) PX2_12.1(A) RZ1_12.6(B<0>)
UNNAMED_1_CAPN4I_I10_A_2_13: CN1_13.5(A<0>) D1_13.4(A3) D1_13.7(B3) PX2_13.1(A) RZ1_13.6(B<0>)
UNNAMED_1_CAPN4I_I10_A_2_14: CN1_14.5(A<0>) D1_14.4(A3) D1_14.7(B3) PX2_14.1(A) RZ1_14.6(B<0>)
UNNAMED_1_CAPN4I_I10_A_2_15: CN1_15.5(A<0>) D1_15.4(A3) D1_15.7(B3) PX2_15.1(A) RZ1_15.6(B<0>)
UNNAMED_1_CAPN4I_I10_A_2_16: CN1_16.5(A<0>) D1_16.4(A3) D1_16.7(B3) PX2_16.1(A) RZ1_16.6(B<0>)
UNNAMED_1_CAPN4I_I10_A_3: CN1_3.1(A<0>) D1_3.1(A1) D1_3.10(B1) PX4_3.1(A) RZ1_3.8(B<0>)
UNNAMED_1_CAPN4I_I10_A_3_1: CN1_1.7(A<0>) D1_1.5(A4) D1_1.6(B4) PX1_1.1(A) RZ1_1.5(B<0>)
UNNAMED_1_CAPN4I_I10_A_3_2: CN1_2.7(A<0>) D1_2.5(A4) D1_2.6(B4) PX1_2.1(A) RZ1_2.5(B<0>)
UNNAMED_1_CAPN4I_I10_A_3_3: CN1_3.7(A<0>) D1_3.5(A4) D1_3.6(B4) PX1_3.1(A) RZ1_3.5(B<0>)
UNNAMED_1_CAPN4I_I10_A_3_4: CN1_4.7(A<0>) D1_4.5(A4) D1_4.6(B4) PX1_4.1(A) RZ1_4.5(B<0>)
UNNAMED_1_CAPN4I_I10_A_3_5: CN1_5.7(A<0>) D1_5.5(A4) D1_5.6(B4) PX1_5.1(A) RZ1_5.5(B<0>)
UNNAMED_1_CAPN4I_I10_A_3_6: CN1_6.7(A<0>) D1_6.5(A4) D1_6.6(B4) PX1_6.1(A) RZ1_6.5(B<0>)
UNNAMED_1_CAPN4I_I10_A_3_7: CN1_7.7(A<0>) D1_7.5(A4) D1_7.6(B4) PX1_7.1(A) RZ1_7.5(B<0>)
UNNAMED_1_CAPN4I_I10_A_3_8: CN1_8.7(A<0>) D1_8.5(A4) D1_8.6(B4) PX1_8.1(A) RZ1_8.5(B<0>)
UNNAMED_1_CAPN4I_I10_A_3_9: CN1_9.7(A<0>) D1_9.5(A4) D1_9.6(B4) PX1_9.1(A) RZ1_9.5(B<0>)
UNNAMED_1_CAPN4I_I10_A_3_10: CN1_10.7(A<0>) D1_10.5(A4) D1_10.6(B4) PX1_10.1(A) RZ1_10.5(B<0>)
UNNAMED_1_CAPN4I_I10_A_3_11: CN1_11.7(A<0>) D1_11.5(A4) D1_11.6(B4) PX1_11.1(A) RZ1_11.5(B<0>)
UNNAMED_1_CAPN4I_I10_A_3_12: CN1_12.7(A<0>) D1_12.5(A4) D1_12.6(B4) PX1_12.1(A) RZ1_12.5(B<0>)
UNNAMED_1_CAPN4I_I10_A_3_13: CN1_13.7(A<0>) D1_13.5(A4) D1_13.6(B4) PX1_13.1(A) RZ1_13.5(B<0>)
UNNAMED_1_CAPN4I_I10_A_3_14: CN1_14.7(A<0>) D1_14.5(A4) D1_14.6(B4) PX1_14.1(A) RZ1_14.5(B<0>)
UNNAMED_1_CAPN4I_I10_A_3_15: CN1_15.7(A<0>) D1_15.5(A4) D1_15.6(B4) PX1_15.1(A) RZ1_15.5(B<0>)
UNNAMED_1_CAPN4I_I10_A_3_16: CN1_16.7(A<0>) D1_16.5(A4) D1_16.6(B4) PX1_16.1(A) RZ1_16.5(B<0>)
UNNAMED_1_CAPN4I_I10_A_4: CN1_4.1(A<0>) D1_4.1(A1) D1_4.10(B1) PX4_4.1(A) RZ1_4.8(B<0>)
UNNAMED_1_CAPN4I_I10_A_5: CN1_5.1(A<0>) D1_5.1(A1) D1_5.10(B1) PX4_5.1(A) RZ1_5.8(B<0>)
UNNAMED_1_CAPN4I_I10_A_6: CN1_6.1(A<0>) D1_6.1(A1) D1_6.10(B1) PX4_6.1(A) RZ1_6.8(B<0>)
UNNAMED_1_CAPN4I_I10_A_7: CN1_7.1(A<0>) D1_7.1(A1) D1_7.10(B1) PX4_7.1(A) RZ1_7.8(B<0>)
UNNAMED_1_CAPN4I_I10_A_8: CN1_8.1(A<0>) D1_8.1(A1) D1_8.10(B1) PX4_8.1(A) RZ1_8.8(B<0>)
UNNAMED_1_CAPN4I_I10_A_9: CN1_9.1(A<0>) D1_9.1(A1) D1_9.10(B1) PX4_9.1(A) RZ1_9.8(B<0>)
UNNAMED_1_CAPN4I_I10_A_10: CN1_10.1(A<0>) D1_10.1(A1) D1_10.10(B1) PX4_10.1(A) RZ1_10.8(B<0>)
UNNAMED_1_CAPN4I_I10_A_11: CN1_11.1(A<0>) D1_11.1(A1) D1_11.10(B1) PX4_11.1(A) RZ1_11.8(B<0>)
UNNAMED_1_CAPN4I_I10_A_12: CN1_12.1(A<0>) D1_12.1(A1) D1_12.10(B1) PX4_12.1(A) RZ1_12.8(B<0>)
UNNAMED_1_CAPN4I_I10_A_13: CN1_13.1(A<0>) D1_13.1(A1) D1_13.10(B1) PX4_13.1(A) RZ1_13.8(B<0>)
UNNAMED_1_CAPN4I_I10_A_14: CN1_14.1(A<0>) D1_14.1(A1) D1_14.10(B1) PX4_14.1(A) RZ1_14.8(B<0>)
UNNAMED_1_CAPN4I_I10_A_15: CN1_15.1(A<0>) D1_15.1(A1) D1_15.10(B1) PX4_15.1(A) RZ1_15.8(B<0>)
UNNAMED_1_CAPN4I_I10_A_16: CN1_16.1(A<0>) D1_16.1(A1) D1_16.10(B1) PX4_16.1(A) RZ1_16.8(B<0>)

Pads without a net: NOREF 1; NOREF#2 1; NOREF#3 1; NOREF#4 1; NOREF#6 1; NOREF#7 1; NOREF#8 1; NOREF#9 1; NOREF#10 1; NOREF#11 1; NOREF#14 1; NOREF#15 1; NOREF#16 1; NOREF#17 1

## Via types
v1: diameter 0.61, hole 0.33, TOP to BOTTOM, 177 vias

## Routing (per net, layer and track width the routed paths; a pad name or vN(x,y) marks a point on that pad's centre or on a via; arc(x,y) is an arc through that point)
GND_SIGNAL: length 2072.6
  TOP w0.18: v1(110,59.1) D1_6.8 D1_6.3 v1(110,56.5) ; v1(26.5,110) D1_15.3 D1_15.8 v1(29.1,110) ; v1(150,26.5) D1_8.3 D1_8.8 v1(150,29.1) ; v1(26.5,70) D1_1.3 D1_1.8 v1(29.1,70) ; v1(30,150.9) D1_16.8 D1_16.3 v1(30,153.5) ; v1(150,150.9) D1_10.8 D1_10.3 v1(150,153.5) ; v1(110,120.9) D1_12.8 D1_12.3 v1(110,123.5) ; v1(70,123.5) D1_14.3 D1_14.8 v1(70,120.9) ; v1(70,56.5) D1_3.3 D1_3.8 v1(70,59.1) ; v1(110,163.5) D1_11.3 D1_11.8 v1(110,160.9) ; v1(150.9,110) D1_9.8 D1_9.3 v1(153.5,110) ; v1(150.9,70) D1_7.8 D1_7.3 v1(153.5,70) ; v1(70,16.5) D1_4.3 D1_4.8 v1(70,19.1) ; v1(110,16.5) D1_5.3 D1_5.8 v1(110,19.1) ; v1(70,160.9) D1_13.8 D1_13.3 v1(70,163.5) ; v1(30,26.5) D1_2.3 D1_2.8 v1(30,29.1)
  TOP w0.226: v1(69,85.2) 69.36,85.56 J1.128 ; J1.144 v1(64.28,85.39) ; 82.38,88.47 J1.100 82,87.15 ; 111.2,126.3 RZ1_12.1 ; 68.8,53.7 RZ1_3.1 ; 71.2,166.3 RZ1_13.1 ; 156.3,108.8 RZ1_9.1 ; 108.8,13.7 RZ1_5.1 ; 97.62,88.47 J1.52 98,87.15 ; 68.8,13.7 RZ1_4.1 ; 148.8,23.7 RZ1_8.1 ; 151.2,156.3 RZ1_10.1 ; 108.8,53.7 RZ1_6.1 ; 28.8,23.7 RZ1_2.1 ; 31.2,156.3 RZ1_16.1 ; 23.7,111.2 RZ1_15.1 ; 23.7,71.2 RZ1_1.1 ; 111.2,166.3 RZ1_11.1 ; 156.3,68.8 RZ1_7.1 ; 71.2,126.3 RZ1_14.1 ; J1.136 v1(66.83,85.33)
  TOP w0.26: v1(71.2,128.1) 71.2,126.3 ; RZ1_14.2 v1(70.4,127.2) ; RZ1_9.3 v1(158.1,110.4) ; RZ1_11.3 v1(109.6,168.1) ; RZ1_13.2 v1(70.4,167.2) ; RZ1_5.3 v1(110.4,11.9) ; RZ1_15.3 v1(21.9,109.6) ; RZ1_4.2 v1(69.6,12.8) ; v1(71.2,168.1) 71.2,166.3 ; RZ1_9.4 v1(157.2,111.2) ; RZ1_7.3 v1(158.1,70.4) ; RZ1_4.4 v1(71.2,12.8) ; v1(111.2,168.1) 111.2,166.3 ; RZ1_5.4 v1(111.2,12.8) ; v1(111.2,128.1) 111.2,126.3 ; v1(148.8,21.9) 148.8,23.7 ; RZ1_10.2 v1(150.4,157.2) ; RZ1_3.2 v1(69.6,52.8) ; RZ1_1.2 v1(22.8,70.4) ; RZ1_16.4 v1(28.8,157.2) ; v1(21.9,71.2) 23.7,71.2 ; v1(108.8,11.9) 108.8,13.7 ; v1(68.8,11.9) 68.8,13.7 ; RZ1_14.3 v1(69.6,128.1) ; RZ1_2.2 v1(29.6,22.8) ; RZ1_14.4 v1(68.8,127.2) ; RZ1_10.3 v1(149.6,158.1) ; RZ1_7.2 v1(157.2,69.6) ; v1(21.9,111.2) 23.7,111.2 ; RZ1_12.4 v1(108.8,127.2) ; RZ1_8.2 v1(149.6,22.8) ; v1(108.8,51.9) 108.8,53.7 ; RZ1_10.4 v1(148.8,157.2) ; RZ1_6.4 v1(111.2,52.8) ; v1(28.8,21.9) 28.8,23.7 ; RZ1_16.2 v1(30.4,157.2) ; RZ1_8.3 v1(150.4,21.9) ; RZ1_3.4 v1(71.2,52.8) ; RZ1_12.2 v1(110.4,127.2) ; RZ1_5.2 v1(109.6,12.8) ; RZ1_1.3 v1(21.9,69.6) ; RZ1_15.2 v1(22.8,110.4) ; RZ1_4.3 v1(70.4,11.9) ; RZ1_11.4 v1(108.8,167.2) ; v1(158.1,108.8) 156.3,108.8 ; RZ1_6.3 v1(110.4,51.9) ; RZ1_6.2 v1(109.6,52.8) ; RZ1_11.2 v1(110.4,167.2) ; v1(68.8,51.9) 68.8,53.7 ; RZ1_7.4 v1(157.2,71.2) ; RZ1_9.2 v1(157.2,109.6) ; RZ1_15.4 v1(22.8,108.8) ; RZ1_3.3 v1(70.4,51.9) ; RZ1_1.4 v1(22.8,68.8) ; RZ1_13.4 v1(68.8,167.2) ; RZ1_2.3 v1(30.4,21.9) ; RZ1_2.4 v1(31.2,22.8) ; RZ1_16.3 v1(29.6,158.1) ; RZ1_13.3 v1(69.6,168.1) ; v1(158.1,68.8) 156.3,68.8 ; RZ1_8.4 v1(151.2,22.8) ; v1(31.2,158.1) 31.2,156.3 ; v1(151.2,158.1) 151.2,156.3 ; RZ1_12.3 v1(109.6,128.1)
  TOP w0.35: J1.24 v1(110.64,88.98) ; J1.116 v1(73.18,89.05) ; J1.1 v1(117.62,90.95) ; J1.60 v1(95.08,89.08) ; J1.113 v1(73.81,90.95) ; J1.57 v1(95.72,90.95) ; J1.146 v1(63.65,88.98) ; J1.12 v1(114.45,88.98) ; J1.45 v1(103.65,90.95) ; J1.133 v1(67.46,90.95) ; J1.109 v1(75.08,90.95) ; 106.83,87.15 v1(106.83,88.98) ; J1.9 v1(115.08,90.95) ; J1.80 v1(88.73,89.08) ; J1.120 v1(71.91,89.02) ; J1.97 v1(83.02,90.95) ; J1.92 v1(84.92,89.08) ; J1.33 v1(107.46,90.95) ; J1.108 v1(75.72,88.91) ; 74.44,87.15 v1(74.45,89.08) ; J1.5 v1(116.35,90.95) ; J1.48 v1(103.02,88.98) ; 76.98,87.15 v1(76.99,89.01) ; J1.137 v1(66.19,90.95) ; J1.100 v1(82.38,89.08) ; J1.140 v1(65.56,89.07) ; J1.81 v1(88.09,90.95) ; J1.41 v1(104.92,90.95) ; J1.129 v1(68.73,90.95) ; J1.85 v1(86.83,90.95) ; J1.29 v1(108.73,90.95) ; J1.125 v1(70,90.95) ; J1.124 v1(70.64,89.06) ; J1.93 v1(84.28,90.95) ; J1.76 v1(90,89.08) ; J1.25 v1(110,90.95) ; J1.37 v1(106.19,90.95) ; J1.40 v1(105.56,88.98) ; 91.91,92.85 v1(91.91,90.95) ; J1.141 v1(64.92,90.95) ; J1.117 v1(72.54,90.95) ; J1.44 v1(104.29,88.98) ; J1.17 v1(112.54,90.95) ; J1.4 v1(116.99,88.98) ; J1.21 v1(111.27,90.95) ; J1.88 v1(86.19,89.08) ; J1.89 v1(85.56,90.95) ; J1.61 v1(94.44,90.95) ; J1.72 v1(91.27,89.08) ; J1.52 v1(97.62,89.08) ; J1.101 v1(77.62,90.95) ; J1.20 v1(111.91,88.98) ; J1.53 v1(96.98,90.95) ; J1.121 v1(71.27,90.95) ; J1.32 v1(108.1,88.98) ; 109.36,87.15 v1(109.37,88.98) ; J1.16 v1(113.18,88.98) ; J1.73 v1(90.64,90.95) ; J1.64 v1(93.81,89.08) ; J1.105 v1(76.35,90.95) ; J1.68 v1(92.54,89.08) ; J1.13 v1(113.81,90.95) ; 89.36,92.85 v1(89.36,90.95) ; J1.132 v1(68.1,88.93) ; J1.84 v1(87.46,89.08) ; J1.56 v1(96.35,89.08) ; J1.145 v1(63.65,90.95) ; J1.8 v1(115.72,88.98) ; J1.96 v1(83.65,89.08) ; J1.49 v1(102.38,90.95) ; J1.65 v1(93.17,90.95)
  L2 w0.226: 62.55,71.66 PX4_3.3 ; PX4_3.3 61.67,72.53 ; PX4_3.3 63.42,72.53 ; PX4_3.3 62.55,73.41 ; PX2_4.5 77.47,8.33 ; PX2_4.5 77.47,6.58 ; PX2_4.5 76.59,7.45 ; PX2_4.5 78.34,7.45 ; PX3_9.2 157.47,98.34 ; PX3_9.2 156.59,97.47 ; PX3_9.2 157.47,96.59 ; PX3_9.2 158.34,97.47 ; PX4_14.4 78.33,112.55 ; PX4_14.4 77.45,111.67 ; PX4_14.4 76.58,112.55 ; PX4_14.4 77.45,113.42 ; 137.47,81.67 PX1_7.3 ; PX1_7.3 136.59,82.55 ; PX1_7.3 137.47,83.42 ; PX1_7.3 138.34,82.55 ; PX3_13.4 78.33,172.55 ; PX3_13.4 76.58,172.55 ; PX3_13.4 77.45,173.42 ; PX3_13.4 77.45,171.67 ; 42.53,141.67 PX4_16.5 ; PX4_16.5 42.53,143.42 ; PX4_16.5 43.41,142.55 ; PX4_16.5 41.66,142.55 ; 97.45,166.59 PX2_11.3 ; PX2_11.3 98.33,167.47 ; PX2_11.3 96.58,167.47 ; PX2_11.3 97.45,168.34 ; 161.67,122.55 PX2_9.4 ; PX2_9.4 162.55,123.42 ; PX2_9.4 163.42,122.55 ; PX2_9.4 162.55,121.67 ; 161.67,82.55 PX2_7.4 ; PX2_7.4 163.42,82.55 ; PX2_7.4 162.55,83.42 ; PX2_7.4 162.55,81.67 ; PX3_10.5 162.53,163.42 ; PX3_10.5 161.66,162.55 ; PX3_10.5 162.53,161.67 ; PX3_10.5 163.41,162.55 ; PX4_2.5 17.47,38.33 ; PX4_2.5 17.47,36.58 ; PX4_2.5 16.59,37.45 ; PX4_2.5 18.34,37.45 ; 22.53,101.66 PX2_15.2 ; PX2_15.2 21.66,102.53 ; PX2_15.2 22.53,103.41 ; PX2_15.2 23.41,102.53 ; PX1_13.5 62.53,153.42 ; PX1_13.5 63.41,152.55 ; PX1_13.5 62.53,151.67 ; PX1_13.5 61.66,152.55 ; PX1_9.3 138.34,122.55 ; PX1_9.3 137.47,123.42 ; PX1_9.3 136.59,122.55 ; PX1_9.3 137.47,121.67 ; PX3_2.5 18.34,17.45 ; PX3_2.5 17.47,16.58 ; PX3_2.5 17.47,18.33 ; PX3_2.5 16.59,17.45 ; 122.53,166.59 PX3_11.2 ; PX3_11.2 123.41,167.47 ; PX3_11.2 121.66,167.47 ; PX3_11.2 122.53,168.34 ; 16.58,77.45 PX3_1.4 ; PX3_1.4 17.45,78.33 ; PX3_1.4 17.45,76.58 ; PX3_1.4 18.33,77.45 ; PX1_6.4 123.42,67.45 ; PX1_6.4 122.55,66.58 ; PX1_6.4 121.67,67.45 ; PX1_6.4 122.55,68.33 ; 142.55,61.67 PX4_7.4 ; PX4_7.4 142.55,63.42 ; PX4_7.4 141.67,62.55 ; PX4_7.4 143.42,62.55 ; 136.59,102.55 PX4_9.3 ; PX4_9.3 138.34,102.55 ; PX4_9.3 137.47,101.67 ; PX4_9.3 137.47,103.42 ; PX2_16.4 17.45,163.42 ; PX2_16.4 16.58,162.55 ; PX2_16.4 18.33,162.55 ; PX2_16.4 17.45,161.67 ; PX4_3.4 63.42,67.45 ; PX4_3.4 62.55,68.33 ; PX4_3.4 62.55,66.58 ; PX4_3.4 61.67,67.45 ; PX1_8.2 158.34,42.53 ; PX1_8.2 157.47,43.41 ; PX1_8.2 157.47,41.66 ; PX1_8.2 156.59,42.53 ; 116.59,52.53 PX2_6.2 ; PX2_6.2 117.47,53.41 ; PX2_6.2 118.34,52.53 ; PX2_6.2 117.47,51.66 ; PX4_8.4 142.55,38.33 ; PX4_8.4 141.67,37.45 ; PX4_8.4 142.55,36.58 ; PX4_8.4 143.42,37.45 ; 116.58,152.55 PX4_11.4 ; PX4_11.4 118.33,152.55 ; PX4_11.4 117.45,153.42 ; PX4_11.4 117.45,151.67 ; 81.67,47.45 PX2_3.4 ; PX2_3.4 82.55,46.58 ; PX2_3.4 82.55,48.33 ; PX2_3.4 83.42,47.45 ; PX4_14.5 82.53,113.42 ; PX4_14.5 82.53,111.67 ; PX4_14.5 83.41,112.55 ; PX4_14.5 81.66,112.55 ; 21.66,157.47 PX2_16.2 ; PX2_16.2 22.53,156.59 ; PX2_16.2 22.53,158.34 ; PX2_16.2 23.41,157.47 ; 156.59,57.47 PX3_7.2 ; PX3_7.2 158.34,57.47 ; PX3_7.2 157.47,56.59 ; PX3_7.2 157.47,58.34 ; 57.45,106.59 PX1_14.3 ; PX1_14.3 56.58,107.47 ; PX1_14.3 57.45,108.34 ; PX1_14.3 58.33,107.47 ; PX3_9.5 162.55,98.34 ; PX3_9.5 163.42,97.47 ; PX3_9.5 162.55,96.59 ; PX3_9.5 161.67,97.47 ; PX3_8.5 137.47,18.33 ; PX3_8.5 136.59,17.45 ; PX3_8.5 137.47,16.58 ; PX3_8.5 138.34,17.45 ; PX1_9.5 143.42,117.47 ; PX1_9.5 142.55,116.59 ; PX1_9.5 141.67,117.47 ; PX1_9.5 142.55,118.34 ; 62.53,146.59 PX1_13.2 ; PX1_13.2 62.53,148.34 ; PX1_13.2 61.66,147.47 ; PX1_13.2 63.41,147.47 ; 102.55,26.58 PX4_5.4 ; PX4_5.4 102.55,28.33 ; PX4_5.4 101.67,27.45 ; PX4_5.4 103.42,27.45 ; 141.66,162.55 PX2_10.5 ; PX2_10.5 142.53,161.67 ; PX2_10.5 142.53,163.42 ; PX2_10.5 143.41,162.55 ; PX4_16.3 37.45,138.34 ; PX4_16.3 38.33,137.47 ; PX4_16.3 36.58,137.47 ; PX4_16.3 37.45,136.59 ; PX4_4.4 63.42,27.45 ; PX4_4.4 62.55,28.33 ; PX4_4.4 61.67,27.45 ; PX4_4.4 62.55,26.58 ; PX2_12.2 102.53,128.34 ; PX2_12.2 103.41,127.47 ; PX2_12.2 102.53,126.59 ; PX2_12.2 101.66,127.47 ; 122.53,171.67 PX3_11.5 ; PX3_11.5 122.53,173.42 ; PX3_11.5 123.41,172.55 ; PX3_11.5 121.66,172.55 ; 142.53,141.67 PX1_10.5 ; PX1_10.5 141.66,142.55 ; PX1_10.5 142.53,143.42 ; PX1_10.5 143.41,142.55 ; 142.55,41.66 PX4_8.3 ; PX4_8.3 142.55,43.41 ; PX4_8.3 143.42,42.53 ; PX4_8.3 141.67,42.53 ; PX2_14.4 58.33,132.55 ; PX2_14.4 57.45,131.67 ; PX2_14.4 56.58,132.55 ; PX2_14.4 57.45,133.42 ; PX3_6.3 102.55,53.41 ; PX3_6.3 101.67,52.53 ; PX3_6.3 103.42,52.53 ; PX3_6.3 102.55,51.66 ; 117.47,26.58 PX1_5.5 ; PX1_5.5 118.34,27.45 ; PX1_5.5 117.47,28.33 ; PX1_5.5 116.59,27.45 ; PX1_7.4 142.55,83.42 ; PX1_7.4 141.67,82.55 ; PX1_7.4 142.55,81.67 ; PX1_7.4 143.42,82.55 ; 161.67,17.45 PX2_8.4 ; PX2_8.4 162.55,18.33 ; PX2_8.4 163.42,17.45 ; PX2_8.4 162.55,16.58 ; PX1_8.4 162.55,38.33 ; PX1_8.4 161.67,37.45 ; PX1_8.4 163.42,37.45 ; PX1_8.4 162.55,36.58 ; PX4_12.5 123.41,112.55 ; PX4_12.5 122.53,113.42 ; PX4_12.5 122.53,111.67 ; PX4_12.5 121.66,112.55 ; PX3_5.3 103.42,12.53 ; PX3_5.3 102.55,11.66 ; PX3_5.3 101.67,12.53 ; PX3_5.3 102.55,13.41 ; PX1_9.2 137.47,118.34 ; PX1_9.2 137.47,116.59 ; PX1_9.2 138.34,117.47 ; PX1_9.2 136.59,117.47 ; PX1_13.3 58.33,147.47 ; PX1_13.3 57.45,148.34 ; PX1_13.3 56.58,147.47 ; PX1_13.3 57.45,146.59 ; PX2_4.4 83.42,7.45 ; PX2_4.4 82.55,8.33 ; PX2_4.4 81.67,7.45 ; PX2_4.4 82.55,6.58 ; 157.47,81.67 PX2_7.3 ; PX2_7.3 157.47,83.42 ; PX2_7.3 158.34,82.55 ; PX2_7.3 156.59,82.55 ; 17.45,81.66 PX3_1.5 ; PX3_1.5 16.58,82.53 ; PX3_1.5 18.33,82.53 ; PX3_1.5 17.45,83.41 ; 57.47,26.58 PX4_4.5 ; PX4_4.5 58.34,27.45 ; PX4_4.5 57.47,28.33 ; PX4_4.5 56.59,27.45 ; PX3_8.4 142.55,18.33 ; PX3_8.4 143.42,17.45 ; PX3_8.4 141.67,17.45 ; PX3_8.4 142.55,16.58 ; 136.58,137.47 PX1_10.3 ; PX1_10.3 138.33,137.47 ; PX1_10.3 137.45,138.34 ; PX1_10.3 137.45,136.59 ; 77.47,71.66 PX1_3.2 ; PX1_3.2 77.47,73.41 ; PX1_3.2 76.59,72.53 ; PX1_3.2 78.34,72.53 ; PX3_7.3 158.34,62.55 ; PX3_7.3 156.59,62.55 ; PX3_7.3 157.47,63.42 ; PX3_7.3 157.47,61.67 ; 61.66,132.55 PX2_14.5 ; PX2_14.5 62.53,131.67 ; PX2_14.5 63.41,132.55 ; PX2_14.5 62.53,133.42 ; 82.53,131.67 PX3_14.5 ; PX3_14.5 81.66,132.55 ; PX3_14.5 82.53,133.42 ; PX3_14.5 83.41,132.55 ; 42.53,96.58 PX1_15.3 ; PX1_15.3 41.66,97.45 ; PX1_15.3 42.53,98.33 ; PX1_15.3 43.41,97.45 ; PX1_6.2 118.34,72.53 ; PX1_6.2 117.47,71.66 ; PX1_6.2 116.59,72.53 ; PX1_6.2 117.47,73.41 ; 82.53,146.59 PX4_13.2 ; PX4_13.2 83.41,147.47 ; PX4_13.2 82.53,148.34 ; PX4_13.2 81.66,147.47 ; 121.67,27.45 PX1_5.4 ; PX1_5.4 123.42,27.45 ; PX1_5.4 122.55,28.33 ; PX1_5.4 122.55,26.58 ; PX1_6.3 122.55,73.41 ; PX1_6.3 123.42,72.53 ; PX1_6.3 121.67,72.53 ; PX1_6.3 122.55,71.66 ; 61.67,47.45 PX3_3.4 ; PX3_3.4 62.55,46.58 ; PX3_3.4 62.55,48.33 ; PX3_3.4 63.42,47.45 ; 57.45,166.59 PX2_13.3 ; PX2_13.3 57.45,168.34 ; PX2_13.3 58.33,167.47 ; PX2_13.3 56.58,167.47 ; PX3_4.3 63.42,12.53 ; PX3_4.3 62.55,11.66 ; PX3_4.3 61.67,12.53 ; PX3_4.3 62.55,13.41 ; 37.45,76.58 PX4_1.4 ; PX4_1.4 38.33,77.45 ; PX4_1.4 36.58,77.45 ; PX4_1.4 37.45,78.33 ; PX2_3.5 78.34,47.45 ; PX2_3.5 77.47,48.33 ; PX2_3.5 76.59,47.45 ; PX2_3.5 77.47,46.58 ; 41.66,157.47 PX3_16.2 ; PX3_16.2 42.53,158.34 ; PX3_16.2 43.41,157.47 ; PX3_16.2 42.53,156.59 ; PX3_11.3 118.33,167.47 ; PX3_11.3 116.58,167.47 ; PX3_11.3 117.45,168.34 ; PX3_11.3 117.45,166.59 ; PX1_3.3 83.42,72.53 ; PX1_3.3 82.55,71.66 ; PX1_3.3 81.67,72.53 ; PX1_3.3 82.55,73.41 ; PX4_12.2 123.41,107.47 ; PX4_12.2 122.53,106.59 ; PX4_12.2 121.66,107.47 ; PX4_12.2 122.53,108.34 ; 161.67,77.47 PX2_7.5 ; PX2_7.5 162.55,76.59 ; PX2_7.5 162.55,78.34 ; PX2_7.5 163.42,77.47 ; 57.47,71.66 PX4_3.2 ; PX4_3.2 57.47,73.41 ; PX4_3.2 58.34,72.53 ; PX4_3.2 56.59,72.53 ; PX1_5.2 118.34,32.53 ; PX1_5.2 117.47,33.41 ; PX1_5.2 116.59,32.53 ; PX1_5.2 117.47,31.66 ; PX1_4.5 78.34,27.45 ; PX1_4.5 77.47,28.33 ; PX1_4.5 76.59,27.45 ; PX1_4.5 77.47,26.58 ; 122.55,51.66 PX2_6.3 ; PX2_6.3 123.42,52.53 ; PX2_6.3 122.55,53.41 ; PX2_6.3 121.67,52.53 ; 161.67,62.55 PX3_7.4 ; PX3_7.4 162.55,63.42 ; PX3_7.4 163.42,62.55 ; PX3_7.4 162.55,61.67 ; 136.59,57.47 PX4_7.2 ; PX4_7.2 137.47,56.59 ; PX4_7.2 137.47,58.34 ; PX4_7.2 138.34,57.47 ; PX2_6.4 122.55,48.33 ; PX2_6.4 122.55,46.58 ; PX2_6.4 121.67,47.45 ; PX2_6.4 123.42,47.45 ; 157.47,16.58 PX2_8.5 ; PX2_8.5 157.47,18.33 ; PX2_8.5 156.59,17.45 ; PX2_8.5 158.34,17.45 ; 102.55,71.66 PX4_6.3 ; PX4_6.3 101.67,72.53 ; PX4_6.3 102.55,73.41 ; PX4_6.3 103.42,72.53 ; PX2_2.4 42.55,18.33 ; PX2_2.4 43.42,17.45 ; PX2_2.4 42.55,16.58 ; PX2_2.4 41.67,17.45 ; 156.58,162.55 PX3_10.4 ; PX3_10.4 158.33,162.55 ; PX3_10.4 157.45,163.42 ; PX3_10.4 157.45,161.67 ; PX3_12.4 117.45,133.42 ; PX3_12.4 116.58,132.55 ; PX3_12.4 118.33,132.55 ; PX3_12.4 117.45,131.67 ; PX1_6.5 117.47,68.33 ; PX1_6.5 118.34,67.45 ; PX1_6.5 117.47,66.58 ; PX1_6.5 116.59,67.45 ; PX3_8.3 142.55,23.41 ; PX3_8.3 143.42,22.53 ; PX3_8.3 141.67,22.53 ; PX3_8.3 142.55,21.66 ; PX3_8.2 138.34,22.53 ; PX3_8.2 137.47,23.41 ; PX3_8.2 137.47,21.66 ; PX3_8.2 136.59,22.53 ; PX1_11.3 97.45,148.34 ; PX1_11.3 96.58,147.47 ; PX1_11.3 98.33,147.47 ; PX1_11.3 97.45,146.59 ; 121.66,127.47 PX3_12.2 ; PX3_12.2 122.53,128.34 ; PX3_12.2 122.53,126.59 ; PX3_12.2 123.41,127.47 ; PX1_7.2 137.47,78.34 ; PX1_7.2 138.34,77.47 ; PX1_7.2 137.47,76.59 ; PX1_7.2 136.59,77.47 ; 61.67,52.53 PX3_3.3 ; PX3_3.3 62.55,53.41 ; PX3_3.3 62.55,51.66 ; PX3_3.3 63.42,52.53 ; PX2_15.4 17.45,98.33 ; PX2_15.4 16.58,97.45 ; PX2_15.4 17.45,96.58 ; PX2_15.4 18.33,97.45 ; PX4_2.4 23.42,37.45 ; PX4_2.4 22.55,38.33 ; PX4_2.4 22.55,36.58 ; PX4_2.4 21.67,37.45 ; PX1_3.4 82.55,68.33 ; PX1_3.4 81.67,67.45 ; PX1_3.4 82.55,66.58 ; PX1_3.4 83.42,67.45 ; 37.45,81.66 PX4_1.5 ; PX4_1.5 36.58,82.53 ; PX4_1.5 38.33,82.53 ; PX4_1.5 37.45,83.41 ; PX2_12.5 102.53,133.42 ; PX2_12.5 103.41,132.55 ; PX2_12.5 101.66,132.55 ; PX2_12.5 102.53,131.67 ; 122.55,11.66 PX2_5.3 ; PX2_5.3 121.67,12.53 ; PX2_5.3 123.42,12.53 ; PX2_5.3 122.55,13.41 ; 16.59,22.53 PX3_2.2 ; PX3_2.2 17.47,21.66 ; PX3_2.2 17.47,23.41 ; PX3_2.2 18.34,22.53 ; PX1_2.3 42.55,43.41 ; PX1_2.3 43.42,42.53 ; PX1_2.3 42.55,41.66 ; PX1_2.3 41.67,42.53 ; 42.53,116.58 PX4_15.3 ; PX4_15.3 42.53,118.33 ; PX4_15.3 43.41,117.45 ; PX4_15.3 41.66,117.45 ; 56.58,112.55 PX1_14.4 ; PX1_14.4 57.45,111.67 ; PX1_14.4 57.45,113.42 ; PX1_14.4 58.33,112.55 ; PX1_11.5 103.41,152.55 ; PX1_11.5 102.53,151.67 ; PX1_11.5 102.53,153.42 ; PX1_11.5 101.66,152.55 ; 97.45,131.67 PX2_12.4 ; PX2_12.4 96.58,132.55 ; PX2_12.4 97.45,133.42 ; PX2_12.4 98.33,132.55 ; PX1_10.4 138.33,142.55 ; PX1_10.4 137.45,143.42 ; PX1_10.4 137.45,141.67 ; PX1_10.4 136.58,142.55 ; 41.66,102.53 PX1_15.2 ; PX1_15.2 43.41,102.53 ; PX1_15.2 42.53,101.66 ; PX1_15.2 42.53,103.41 ; PX3_2.3 23.42,22.53 ; PX3_2.3 21.67,22.53 ; PX3_2.3 22.55,23.41 ; PX3_2.3 22.55,21.66 ; 16.58,137.47 PX1_16.3 ; PX1_16.3 17.45,138.34 ; PX1_16.3 18.33,137.47 ; PX1_16.3 17.45,136.59 ; PX4_3.5 58.34,67.45 ; PX4_3.5 57.47,66.58 ; PX4_3.5 56.59,67.45 ; PX4_3.5 57.47,68.33 ; PX1_12.4 98.33,112.55 ; PX1_12.4 97.45,113.42 ; PX1_12.4 97.45,111.67 ; PX1_12.4 96.58,112.55 ; PX3_1.3 23.41,77.45 ; PX3_1.3 22.53,76.58 ; PX3_1.3 21.66,77.45 ; PX3_1.3 22.53,78.33 ; 16.58,102.53 PX2_15.5 ; PX2_15.5 18.33,102.53 ; PX2_15.5 17.45,101.66 ; PX2_15.5 17.45,103.41 ; 17.45,121.66 PX3_15.5 ; PX3_15.5 17.45,123.41 ; PX3_15.5 18.33,122.53 ; PX3_15.5 16.58,122.53 ; 62.55,31.66 PX4_4.3 ; PX4_4.3 63.42,32.53 ; PX4_4.3 61.67,32.53 ; PX4_4.3 62.55,33.41 ; PX1_10.2 143.41,137.47 ; PX1_10.2 142.53,138.34 ; PX1_10.2 141.66,137.47 ; PX1_10.2 142.53,136.59 ; PX4_11.2 123.41,147.47 ; PX4_11.2 122.53,148.34 ; PX4_11.2 122.53,146.59 ; PX4_11.2 121.66,147.47 ; 161.67,42.53 PX1_8.3 ; PX1_8.3 162.55,41.66 ; PX1_8.3 163.42,42.53 ; PX1_8.3 162.55,43.41 ; PX3_14.4 77.45,133.42 ; PX3_14.4 78.33,132.55 ; PX3_14.4 77.45,131.67 ; PX3_14.4 76.58,132.55 ; PX1_2.4 43.42,37.45 ; PX1_2.4 41.67,37.45 ; PX1_2.4 42.55,36.58 ; PX1_2.4 42.55,38.33 ; 117.45,111.67 PX4_12.4 ; PX4_12.4 118.33,112.55 ; PX4_12.4 117.45,113.42 ; PX4_12.4 116.58,112.55 ; PX3_14.3 78.33,127.47 ; PX3_14.3 76.58,127.47 ; PX3_14.3 77.45,128.34 ; PX3_14.3 77.45,126.59 ; 82.55,31.66 PX1_4.3 ; PX1_4.3 81.67,32.53 ; PX1_4.3 83.42,32.53 ; PX1_4.3 82.55,33.41 ; PX1_3.5 78.34,67.45 ; PX1_3.5 77.47,66.58 ; PX1_3.5 76.59,67.45 ; PX1_3.5 77.47,68.33 ; PX4_9.5 142.55,98.34 ; PX4_9.5 143.42,97.47 ; PX4_9.5 142.55,96.59 ; PX4_9.5 141.67,97.47 ; PX4_13.5 83.41,152.55 ; PX4_13.5 82.53,153.42 ; PX4_13.5 82.53,151.67 ; PX4_13.5 81.66,152.55 ; 22.55,41.66 PX4_2.3 ; PX4_2.3 22.55,43.41 ; PX4_2.3 21.67,42.53 ; PX4_2.3 23.42,42.53 ; 36.59,17.45 PX2_2.5 ; PX2_2.5 37.47,16.58 ; PX2_2.5 38.34,17.45 ; PX2_2.5 37.47,18.33 ; 62.53,111.67 PX1_14.5 ; PX1_14.5 62.53,113.42 ; PX1_14.5 61.66,112.55 ; PX1_14.5 63.41,112.55 ; PX2_5.5 118.34,7.45 ; PX2_5.5 116.59,7.45 ; PX2_5.5 117.47,8.33 ; PX2_5.5 117.47,6.58 ; 57.45,171.67 PX2_13.4 ; PX2_13.4 58.33,172.55 ; PX2_13.4 57.45,173.42 ; PX2_13.4 56.58,172.55 ; 16.58,117.45 PX3_15.4 ; PX3_15.4 18.33,117.45 ; PX3_15.4 17.45,118.33 ; PX3_15.4 17.45,116.58 ; 156.58,137.47 PX4_10.3 ; PX4_10.3 158.33,137.47 ; PX4_10.3 157.45,136.59 ; PX4_10.3 157.45,138.34 ; 61.66,172.55 PX2_13.5 ; PX2_13.5 62.53,173.42 ; PX2_13.5 62.53,171.67 ; PX2_13.5 63.41,172.55 ; 76.59,12.53 PX2_4.2 ; PX2_4.2 78.34,12.53 ; PX2_4.2 77.47,13.41 ; PX2_4.2 77.47,11.66 ; 16.58,142.55 PX1_16.4 ; PX1_16.4 18.33,142.55 ; PX1_16.4 17.45,143.42 ; PX1_16.4 17.45,141.67 ; 156.58,157.47 PX3_10.3 ; PX3_10.3 157.45,158.34 ; PX3_10.3 158.33,157.47 ; PX3_10.3 157.45,156.59 ; PX1_14.2 62.53,108.34 ; PX1_14.2 62.53,106.59 ; PX1_14.2 63.41,107.47 ; PX1_14.2 61.66,107.47 ; PX3_1.2 23.41,82.53 ; PX3_1.2 22.53,81.66 ; PX3_1.2 21.66,82.53 ; PX3_1.2 22.53,83.41 ; PX1_12.5 103.41,112.55 ; PX1_12.5 102.53,111.67 ; PX1_12.5 101.66,112.55 ; PX1_12.5 102.53,113.42 ; PX3_6.5 98.34,47.45 ; PX3_6.5 96.59,47.45 ; PX3_6.5 97.47,46.58 ; PX3_6.5 97.47,48.33 ; PX4_8.2 137.47,43.41 ; PX4_8.2 136.59,42.53 ; PX4_8.2 137.47,41.66 ; PX4_8.2 138.34,42.53 ; PX2_2.2 37.47,23.41 ; PX2_2.2 37.47,21.66 ; PX2_2.2 38.34,22.53 ; PX2_2.2 36.59,22.53 ; 137.47,36.58 PX4_8.5 ; PX4_8.5 137.47,38.33 ; PX4_8.5 136.59,37.45 ; PX4_8.5 138.34,37.45 ; PX3_5.2 97.47,13.41 ; PX3_5.2 98.34,12.53 ; PX3_5.2 97.47,11.66 ; PX3_5.2 96.59,12.53 ; 161.67,22.53 PX2_8.3 ; PX2_8.3 162.55,21.66 ; PX2_8.3 162.55,23.41 ; PX2_8.3 163.42,22.53 ; PX1_7.5 143.42,77.47 ; PX1_7.5 142.55,76.59 ; PX1_7.5 142.55,78.34 ; PX1_7.5 141.67,77.47 ; 116.58,172.55 PX3_11.4 ; PX3_11.4 117.45,171.67 ; PX3_11.4 117.45,173.42 ; PX3_11.4 118.33,172.55 ; PX3_9.4 163.42,102.55 ; PX3_9.4 162.55,103.42 ; PX3_9.4 162.55,101.67 ; PX3_9.4 161.67,102.55 ; 42.53,136.59 PX4_16.2 ; PX4_16.2 43.41,137.47 ; PX4_16.2 41.66,137.47 ; PX4_16.2 42.53,138.34 ; 21.66,117.45 PX3_15.3 ; PX3_15.3 22.53,116.58 ; PX3_15.3 22.53,118.33 ; PX3_15.3 23.41,117.45 ; 141.67,122.55 PX1_9.4 ; PX1_9.4 142.55,123.42 ; PX1_9.4 143.42,122.55 ; PX1_9.4 142.55,121.67 ; 16.58,57.45 PX2_1.4 ; PX2_1.4 17.45,56.58 ; PX2_1.4 18.33,57.45 ; PX2_1.4 17.45,58.33 ; PX1_4.4 82.55,28.33 ; PX1_4.4 82.55,26.58 ; PX1_4.4 83.42,27.45 ; PX1_4.4 81.67,27.45 ; 121.66,152.55 PX4_11.5 ; PX4_11.5 123.41,152.55 ; PX4_11.5 122.53,151.67 ; PX4_11.5 122.53,153.42 ; PX1_15.4 37.45,98.33 ; PX1_15.4 38.33,97.45 ; PX1_15.4 36.58,97.45 ; PX1_15.4 37.45,96.58 ; 141.67,57.47 PX4_7.5 ; PX4_7.5 143.42,57.47 ; PX4_7.5 142.55,56.59 ; PX4_7.5 142.55,58.34 ; 76.59,32.53 PX1_4.2 ; PX1_4.2 78.34,32.53 ; PX1_4.2 77.47,31.66 ; PX1_4.2 77.47,33.41 ; 77.45,166.59 PX3_13.3 ; PX3_13.3 78.33,167.47 ; PX3_13.3 77.45,168.34 ; PX3_13.3 76.58,167.47 ; PX4_16.4 38.33,142.55 ; PX4_16.4 37.45,143.42 ; PX4_16.4 37.45,141.67 ; PX4_16.4 36.58,142.55 ; 121.67,7.45 PX2_5.4 ; PX2_5.4 122.55,6.58 ; PX2_5.4 123.42,7.45 ; PX2_5.4 122.55,8.33 ; 136.59,97.47 PX4_9.2 ; PX4_9.2 137.47,96.59 ; PX4_9.2 137.47,98.34 ; PX4_9.2 138.34,97.47 ; PX3_13.5 82.53,173.42 ; PX3_13.5 82.53,171.67 ; PX3_13.5 83.41,172.55 ; PX3_13.5 81.66,172.55 ; 56.59,52.53 PX3_3.2 ; PX3_3.2 57.47,51.66 ; PX3_3.2 57.47,53.41 ; PX3_3.2 58.34,52.53 ; PX2_9.3 157.47,123.42 ; PX2_9.3 157.47,121.67 ; PX2_9.3 158.34,122.55 ; PX2_9.3 156.59,122.55 ; 37.45,101.66 PX1_15.5 ; PX1_15.5 36.58,102.53 ; PX1_15.5 37.45,103.41 ; PX1_15.5 38.33,102.53 ; PX2_9.5 163.42,117.47 ; PX2_9.5 162.55,116.59 ; PX2_9.5 162.55,118.34 ; PX2_9.5 161.67,117.47 ; 96.58,107.47 PX1_12.3 ; PX1_12.3 97.45,106.59 ; PX1_12.3 97.45,108.34 ; PX1_12.3 98.33,107.47 ; 157.47,36.58 PX1_8.5 ; PX1_8.5 157.47,38.33 ; PX1_8.5 156.59,37.45 ; PX1_8.5 158.34,37.45 ; PX2_5.2 117.47,13.41 ; PX2_5.2 117.47,11.66 ; PX2_5.2 116.59,12.53 ; PX2_5.2 118.34,12.53 ; 37.45,156.59 PX3_16.3 ; PX3_16.3 36.58,157.47 ; PX3_16.3 38.33,157.47 ; PX3_16.3 37.45,158.34 ; 81.67,12.53 PX2_4.3 ; PX2_4.3 83.42,12.53 ; PX2_4.3 82.55,13.41 ; PX2_4.3 82.55,11.66 ; PX2_15.3 23.41,97.45 ; PX2_15.3 21.66,97.45 ; PX2_15.3 22.53,98.33 ; PX2_15.3 22.53,96.58 ; PX1_13.4 57.45,153.42 ; PX1_13.4 56.58,152.55 ; PX1_13.4 57.45,151.67 ; PX1_13.4 58.33,152.55 ; PX4_15.2 43.41,122.53 ; PX4_15.2 41.66,122.53 ; PX4_15.2 42.53,121.66 ; PX4_15.2 42.53,123.41 ; 162.53,156.59 PX3_10.2 ; PX3_10.2 161.66,157.47 ; PX3_10.2 162.53,158.34 ; PX3_10.2 163.41,157.47 ; PX2_12.3 97.45,128.34 ; PX2_12.3 96.58,127.47 ; PX2_12.3 98.33,127.47 ; PX2_12.3 97.45,126.59 ; 77.45,151.67 PX4_13.4 ; PX4_13.4 78.33,152.55 ; PX4_13.4 77.45,153.42 ; PX4_13.4 76.58,152.55 ; 42.55,21.66 PX2_2.3 ; PX2_2.3 41.67,22.53 ; PX2_2.3 43.42,22.53 ; PX2_2.3 42.55,23.41 ; PX1_1.2 42.53,63.41 ; PX1_1.2 43.41,62.53 ; PX1_1.2 41.66,62.53 ; PX1_1.2 42.53,61.66 ; PX2_6.5 117.47,48.33 ; PX2_6.5 118.34,47.45 ; PX2_6.5 117.47,46.58 ; PX2_6.5 116.59,47.45 ; 57.47,46.58 PX3_3.5 ; PX3_3.5 58.34,47.45 ; PX3_3.5 56.59,47.45 ; PX3_3.5 57.47,48.33 ; 101.66,107.47 PX1_12.2 ; PX1_12.2 102.53,108.34 ; PX1_12.2 102.53,106.59 ; PX1_12.2 103.41,107.47 ; 102.55,46.58 PX3_6.4 ; PX3_6.4 101.67,47.45 ; PX3_6.4 102.55,48.33 ; PX3_6.4 103.42,47.45 ; 37.45,61.66 PX1_1.5 ; PX1_1.5 36.58,62.53 ; PX1_1.5 38.33,62.53 ; PX1_1.5 37.45,63.41 ; 102.55,6.58 PX3_5.4 ; PX3_5.4 101.67,7.45 ; PX3_5.4 103.42,7.45 ; PX3_5.4 102.55,8.33 ; 117.45,126.59 PX3_12.3 ; PX3_12.3 118.33,127.47 ; PX3_12.3 117.45,128.34 ; PX3_12.3 116.58,127.47 ; 157.47,76.59 PX2_7.2 ; PX2_7.2 156.59,77.47 ; PX2_7.2 157.47,78.34 ; PX2_7.2 158.34,77.47 ; PX3_13.2 82.53,168.34 ; PX3_13.2 81.66,167.47 ; PX3_13.2 82.53,166.59 ; PX3_13.2 83.41,167.47 ; 36.58,162.55 PX3_16.4 ; PX3_16.4 37.45,163.42 ; PX3_16.4 37.45,161.67 ; PX3_16.4 38.33,162.55 ; PX2_14.2 63.41,127.47 ; PX2_14.2 61.66,127.47 ; PX2_14.2 62.53,126.59 ; PX2_14.2 62.53,128.34 ; PX2_1.2 23.41,62.53 ; PX2_1.2 22.53,61.66 ; PX2_1.2 22.53,63.41 ; PX2_1.2 21.66,62.53 ; 82.55,51.66 PX2_3.3 ; PX2_3.3 81.67,52.53 ; PX2_3.3 82.55,53.41 ; PX2_3.3 83.42,52.53 ; 81.66,127.47 PX3_14.2 ; PX3_14.2 83.41,127.47 ; PX3_14.2 82.53,128.34 ; PX3_14.2 82.53,126.59 ; 41.66,77.45 PX4_1.3 ; PX4_1.3 42.53,76.58 ; PX4_1.3 42.53,78.33 ; PX4_1.3 43.41,77.45 ; 162.53,141.67 PX4_10.5 ; PX4_10.5 162.53,143.42 ; PX4_10.5 161.66,142.55 ; PX4_10.5 163.41,142.55 ; 136.59,62.55 PX4_7.3 ; PX4_7.3 138.34,62.55 ; PX4_7.3 137.47,61.67 ; PX4_7.3 137.47,63.42 ; PX2_10.2 142.53,158.34 ; PX2_10.2 141.66,157.47 ; PX2_10.2 142.53,156.59 ; PX2_10.2 143.41,157.47 ; PX3_7.5 162.55,58.34 ; PX3_7.5 163.42,57.47 ; PX3_7.5 162.55,56.59 ; PX3_7.5 161.67,57.47 ; 21.66,57.45 PX2_1.3 ; PX2_1.3 23.41,57.45 ; PX2_1.3 22.53,58.33 ; PX2_1.3 22.53,56.58 ; 141.67,102.55 PX4_9.4 ; PX4_9.4 143.42,102.55 ; PX4_9.4 142.55,103.42 ; PX4_9.4 142.55,101.67 ; 16.58,62.53 PX2_1.5 ; PX2_1.5 17.45,61.66 ; PX2_1.5 18.33,62.53 ; PX2_1.5 17.45,63.41 ; PX1_5.3 123.42,32.53 ; PX1_5.3 122.55,31.66 ; PX1_5.3 121.67,32.53 ; PX1_5.3 122.55,33.41 ; PX2_10.3 137.45,158.34 ; PX2_10.3 136.58,157.47 ; PX2_10.3 137.45,156.59 ; PX2_10.3 138.33,157.47 ; 137.45,161.67 PX2_10.4 ; PX2_10.4 137.45,163.42 ; PX2_10.4 136.58,162.55 ; PX2_10.4 138.33,162.55 ; 97.47,71.66 PX4_6.2 ; PX4_6.2 98.34,72.53 ; PX4_6.2 97.47,73.41 ; PX4_6.2 96.59,72.53 ; PX4_15.4 37.45,118.33 ; PX4_15.4 37.45,116.58 ; PX4_15.4 36.58,117.45 ; PX4_15.4 38.33,117.45 ; 102.55,66.58 PX4_6.4 ; PX4_6.4 101.67,67.45 ; PX4_6.4 103.42,67.45 ; PX4_6.4 102.55,68.33 ; PX2_11.4 98.33,172.55 ; PX2_11.4 96.58,172.55 ; PX2_11.4 97.45,173.42 ; PX2_11.4 97.45,171.67 ; 82.53,106.59 PX4_14.2 ; PX4_14.2 83.41,107.47 ; PX4_14.2 81.66,107.47 ; PX4_14.2 82.53,108.34 ; 16.59,42.53 PX4_2.2 ; PX4_2.2 18.34,42.53 ; PX4_2.2 17.47,41.66 ; PX4_2.2 17.47,43.41 ; 101.67,32.53 PX4_5.3 ; PX4_5.3 102.55,33.41 ; PX4_5.3 103.42,32.53 ; PX4_5.3 102.55,31.66 ; PX3_15.2 23.41,122.53 ; PX3_15.2 21.66,122.53 ; PX3_15.2 22.53,123.41 ; PX3_15.2 22.53,121.66 ; 62.53,166.59 PX2_13.2 ; PX2_13.2 63.41,167.47 ; PX2_13.2 62.53,168.34 ; PX2_13.2 61.66,167.47 ; 156.59,117.47 PX2_9.2 ; PX2_9.2 157.47,116.59 ; PX2_9.2 158.34,117.47 ; PX2_9.2 157.47,118.34 ; 116.58,107.47 PX4_12.3 ; PX4_12.3 118.33,107.47 ; PX4_12.3 117.45,106.59 ; PX4_12.3 117.45,108.34 ; 102.53,171.67 PX2_11.5 ; PX2_11.5 102.53,173.42 ; PX2_11.5 101.66,172.55 ; PX2_11.5 103.41,172.55 ; 76.58,107.47 PX4_14.3 ; PX4_14.3 77.45,108.34 ; PX4_14.3 77.45,106.59 ; PX4_14.3 78.33,107.47 ; PX3_4.5 57.47,8.33 ; PX3_4.5 57.47,6.58 ; PX3_4.5 56.59,7.45 ; PX3_4.5 58.34,7.45 ; 41.66,57.45 PX1_1.3 ; PX1_1.3 42.53,58.33 ; PX1_1.3 42.53,56.58 ; PX1_1.3 43.41,57.45 ; PX4_15.5 38.33,122.53 ; PX4_15.5 36.58,122.53 ; PX4_15.5 37.45,121.66 ; PX4_15.5 37.45,123.41 ; PX1_11.4 98.33,152.55 ; PX1_11.4 97.45,153.42 ; PX1_11.4 96.58,152.55 ; PX1_11.4 97.45,151.67 ; PX4_13.3 78.33,147.47 ; PX4_13.3 77.45,146.59 ; PX4_13.3 76.58,147.47 ; PX4_13.3 77.45,148.34 ; PX4_1.2 42.53,83.41 ; PX4_1.2 41.66,82.53 ; PX4_1.2 43.41,82.53 ; PX4_1.2 42.53,81.66 ; 37.47,41.66 PX1_2.2 ; PX1_2.2 36.59,42.53 ; PX1_2.2 38.34,42.53 ; PX1_2.2 37.47,43.41 ; 37.45,56.58 PX1_1.4 ; PX1_1.4 37.45,58.33 ; PX1_1.4 36.58,57.45 ; PX1_1.4 38.33,57.45 ; 17.45,156.59 PX2_16.3 ; PX2_16.3 17.45,158.34 ; PX2_16.3 18.33,157.47 ; PX2_16.3 16.58,157.47 ; PX3_2.4 22.55,18.33 ; PX3_2.4 23.42,17.45 ; PX3_2.4 22.55,16.58 ; PX3_2.4 21.67,17.45 ; 97.47,51.66 PX3_6.2 ; PX3_6.2 96.59,52.53 ; PX3_6.2 98.34,52.53 ; PX3_6.2 97.47,53.41 ; 61.67,7.45 PX3_4.4 ; PX3_4.4 63.42,7.45 ; PX3_4.4 62.55,8.33 ; PX3_4.4 62.55,6.58 ; 156.59,22.53 PX2_8.2 ; PX2_8.2 158.34,22.53 ; PX2_8.2 157.47,21.66 ; PX2_8.2 157.47,23.41 ; 117.45,146.59 PX4_11.3 ; PX4_11.3 117.45,148.34 ; PX4_11.3 116.58,147.47 ; PX4_11.3 118.33,147.47 ; PX3_4.2 57.47,13.41 ; PX3_4.2 57.47,11.66 ; PX3_4.2 58.34,12.53 ; PX3_4.2 56.59,12.53 ; 42.53,161.67 PX3_16.5 ; PX3_16.5 42.53,163.42 ; PX3_16.5 43.41,162.55 ; PX3_16.5 41.66,162.55 ; PX2_14.3 57.45,128.34 ; PX2_14.3 56.58,127.47 ; PX2_14.3 57.45,126.59 ; PX2_14.3 58.33,127.47 ; 96.59,67.45 PX4_6.5 ; PX4_6.5 97.47,66.58 ; PX4_6.5 98.34,67.45 ; PX4_6.5 97.47,68.33 ; 77.47,51.66 PX2_3.2 ; PX2_3.2 76.59,52.53 ; PX2_3.2 77.47,53.41 ; PX2_3.2 78.34,52.53 ; 56.59,32.53 PX4_4.2 ; PX4_4.2 57.47,31.66 ; PX4_4.2 58.34,32.53 ; PX4_4.2 57.47,33.41 ; 36.59,37.45 PX1_2.5 ; PX1_2.5 38.34,37.45 ; PX1_2.5 37.47,36.58 ; PX1_2.5 37.47,38.33 ; PX3_12.5 123.41,132.55 ; PX3_12.5 122.53,131.67 ; PX3_12.5 121.66,132.55 ; PX3_12.5 122.53,133.42 ; 97.47,6.58 PX3_5.5 ; PX3_5.5 97.47,8.33 ; PX3_5.5 96.59,7.45 ; PX3_5.5 98.34,7.45 ; 102.53,166.59 PX2_11.2 ; PX2_11.2 101.66,167.47 ; PX2_11.2 102.53,168.34 ; PX2_11.2 103.41,167.47 ; PX1_16.2 22.53,138.34 ; PX1_16.2 23.41,137.47 ; PX1_16.2 22.53,136.59 ; PX1_16.2 21.66,137.47 ; 101.66,147.47 PX1_11.2 ; PX1_11.2 102.53,146.59 ; PX1_11.2 103.41,147.47 ; PX1_11.2 102.53,148.34 ; 96.59,32.53 PX4_5.2 ; PX4_5.2 97.47,33.41 ; PX4_5.2 97.47,31.66 ; PX4_5.2 98.34,32.53 ; 156.59,102.55 PX3_9.3 ; PX3_9.3 157.47,103.42 ; PX3_9.3 157.47,101.67 ; PX3_9.3 158.34,102.55 ; 22.53,161.67 PX2_16.5 ; PX2_16.5 21.66,162.55 ; PX2_16.5 23.41,162.55 ; PX2_16.5 22.53,163.42 ; PX4_5.5 98.34,27.45 ; PX4_5.5 97.47,28.33 ; PX4_5.5 96.59,27.45 ; PX4_5.5 97.47,26.58 ; PX4_10.2 162.53,138.34 ; PX4_10.2 161.66,137.47 ; PX4_10.2 163.41,137.47 ; PX4_10.2 162.53,136.59 ; PX1_16.5 23.41,142.55 ; PX1_16.5 22.53,141.67 ; PX1_16.5 21.66,142.55 ; PX1_16.5 22.53,143.42 ; PX4_10.4 157.45,143.42 ; PX4_10.4 158.33,142.55 ; PX4_10.4 156.58,142.55 ; PX4_10.4 157.45,141.67
  L3 w0.226: 57.45,166.59 PX2_13.3 ; PX2_13.3 58.33,167.47 ; PX2_13.3 57.45,168.34 ; PX2_13.3 56.58,167.47 ; PX2_9.2 157.47,118.34 ; PX2_9.2 157.47,116.59 ; PX2_9.2 158.34,117.47 ; PX2_9.2 156.59,117.47 ; PX2_11.5 103.41,172.55 ; PX2_11.5 101.66,172.55 ; PX2_11.5 102.53,171.67 ; PX2_11.5 102.53,173.42 ; 42.53,101.66 PX1_15.2 ; PX1_15.2 41.66,102.53 ; PX1_15.2 43.41,102.53 ; PX1_15.2 42.53,103.41 ; PX1_5.4 123.42,27.45 ; PX1_5.4 121.67,27.45 ; PX1_5.4 122.55,26.58 ; PX1_5.4 122.55,28.33 ; 16.58,157.47 PX2_16.3 ; PX2_16.3 17.45,158.34 ; PX2_16.3 18.33,157.47 ; PX2_16.3 17.45,156.59 ; 56.58,132.55 PX2_14.4 ; PX2_14.4 57.45,131.67 ; PX2_14.4 58.33,132.55 ; PX2_14.4 57.45,133.42 ; 142.55,21.66 PX3_8.3 ; PX3_8.3 141.67,22.53 ; PX3_8.3 143.42,22.53 ; PX3_8.3 142.55,23.41 ; PX1_6.4 122.55,68.33 ; PX1_6.4 121.67,67.45 ; PX1_6.4 122.55,66.58 ; PX1_6.4 123.42,67.45 ; 156.58,142.55 PX4_10.4 ; PX4_10.4 158.33,142.55 ; PX4_10.4 157.45,143.42 ; PX4_10.4 157.45,141.67 ; PX3_6.4 102.55,48.33 ; PX3_6.4 101.67,47.45 ; PX3_6.4 102.55,46.58 ; PX3_6.4 103.42,47.45 ; 16.59,42.53 PX4_2.2 ; PX4_2.2 18.34,42.53 ; PX4_2.2 17.47,43.41 ; PX4_2.2 17.47,41.66 ; PX2_2.3 43.42,22.53 ; PX2_2.3 42.55,23.41 ; PX2_2.3 42.55,21.66 ; PX2_2.3 41.67,22.53 ; PX2_10.3 137.45,158.34 ; PX2_10.3 136.58,157.47 ; PX2_10.3 138.33,157.47 ; PX2_10.3 137.45,156.59 ; PX2_16.5 22.53,163.42 ; PX2_16.5 21.66,162.55 ; PX2_16.5 23.41,162.55 ; PX2_16.5 22.53,161.67 ; PX4_5.3 102.55,33.41 ; PX4_5.3 101.67,32.53 ; PX4_5.3 102.55,31.66 ; PX4_5.3 103.42,32.53 ; PX2_4.5 77.47,8.33 ; PX2_4.5 77.47,6.58 ; PX2_4.5 76.59,7.45 ; PX2_4.5 78.34,7.45 ; 156.59,17.45 PX2_8.5 ; PX2_8.5 157.47,16.58 ; PX2_8.5 157.47,18.33 ; PX2_8.5 158.34,17.45 ; PX1_12.4 98.33,112.55 ; PX1_12.4 97.45,111.67 ; PX1_12.4 96.58,112.55 ; PX1_12.4 97.45,113.42 ; PX4_2.3 22.55,43.41 ; PX4_2.3 22.55,41.66 ; PX4_2.3 23.42,42.53 ; PX4_2.3 21.67,42.53 ; 161.66,137.47 PX4_10.2 ; PX4_10.2 162.53,136.59 ; PX4_10.2 163.41,137.47 ; PX4_10.2 162.53,138.34 ; 62.55,71.66 PX4_3.3 ; PX4_3.3 61.67,72.53 ; PX4_3.3 62.55,73.41 ; PX4_3.3 63.42,72.53 ; 142.55,101.67 PX4_9.4 ; PX4_9.4 141.67,102.55 ; PX4_9.4 143.42,102.55 ; PX4_9.4 142.55,103.42 ; 156.59,77.47 PX2_7.2 ; PX2_7.2 158.34,77.47 ; PX2_7.2 157.47,78.34 ; PX2_7.2 157.47,76.59 ; PX4_12.4 118.33,112.55 ; PX4_12.4 117.45,111.67 ; PX4_12.4 116.58,112.55 ; PX4_12.4 117.45,113.42 ; 76.59,47.45 PX2_3.5 ; PX2_3.5 77.47,46.58 ; PX2_3.5 78.34,47.45 ; PX2_3.5 77.47,48.33 ; PX1_15.5 37.45,103.41 ; PX1_15.5 36.58,102.53 ; PX1_15.5 37.45,101.66 ; PX1_15.5 38.33,102.53 ; PX1_4.5 77.47,28.33 ; PX1_4.5 78.34,27.45 ; PX1_4.5 76.59,27.45 ; PX1_4.5 77.47,26.58 ; PX1_8.4 162.55,38.33 ; PX1_8.4 163.42,37.45 ; PX1_8.4 162.55,36.58 ; PX1_8.4 161.67,37.45 ; 42.55,41.66 PX1_2.3 ; PX1_2.3 41.67,42.53 ; PX1_2.3 43.42,42.53 ; PX1_2.3 42.55,43.41 ; PX1_1.4 38.33,57.45 ; PX1_1.4 37.45,58.33 ; PX1_1.4 37.45,56.58 ; PX1_1.4 36.58,57.45 ; PX4_7.3 137.47,63.42 ; PX4_7.3 136.59,62.55 ; PX4_7.3 138.34,62.55 ; PX4_7.3 137.47,61.67 ; 57.47,66.58 PX4_3.5 ; PX4_3.5 56.59,67.45 ; PX4_3.5 58.34,67.45 ; PX4_3.5 57.47,68.33 ; 137.47,116.59 PX1_9.2 ; PX1_9.2 136.59,117.47 ; PX1_9.2 137.47,118.34 ; PX1_9.2 138.34,117.47 ; PX3_2.5 18.34,17.45 ; PX3_2.5 17.47,18.33 ; PX3_2.5 17.47,16.58 ; PX3_2.5 16.59,17.45 ; 17.45,136.59 PX1_16.3 ; PX1_16.3 16.58,137.47 ; PX1_16.3 17.45,138.34 ; PX1_16.3 18.33,137.47 ; PX4_10.5 162.53,143.42 ; PX4_10.5 162.53,141.67 ; PX4_10.5 163.41,142.55 ; PX4_10.5 161.66,142.55 ; PX2_15.3 23.41,97.45 ; PX2_15.3 22.53,96.58 ; PX2_15.3 22.53,98.33 ; PX2_15.3 21.66,97.45 ; 157.47,21.66 PX2_8.2 ; PX2_8.2 156.59,22.53 ; PX2_8.2 158.34,22.53 ; PX2_8.2 157.47,23.41 ; PX3_6.3 103.42,52.53 ; PX3_6.3 102.55,53.41 ; PX3_6.3 101.67,52.53 ; PX3_6.3 102.55,51.66 ; PX1_11.4 97.45,153.42 ; PX1_11.4 96.58,152.55 ; PX1_11.4 97.45,151.67 ; PX1_11.4 98.33,152.55 ; 101.66,147.47 PX1_11.2 ; PX1_11.2 102.53,146.59 ; PX1_11.2 103.41,147.47 ; PX1_11.2 102.53,148.34 ; PX4_13.2 82.53,148.34 ; PX4_13.2 82.53,146.59 ; PX4_13.2 81.66,147.47 ; PX4_13.2 83.41,147.47 ; 42.53,156.59 PX3_16.2 ; PX3_16.2 43.41,157.47 ; PX3_16.2 41.66,157.47 ; PX3_16.2 42.53,158.34 ; PX2_16.4 18.33,162.55 ; PX2_16.4 17.45,163.42 ; PX2_16.4 17.45,161.67 ; PX2_16.4 16.58,162.55 ; 101.67,12.53 PX3_5.3 ; PX3_5.3 102.55,13.41 ; PX3_5.3 103.42,12.53 ; PX3_5.3 102.55,11.66 ; 137.47,101.67 PX4_9.3 ; PX4_9.3 137.47,103.42 ; PX4_9.3 138.34,102.55 ; PX4_9.3 136.59,102.55 ; PX1_8.3 163.42,42.53 ; PX1_8.3 161.67,42.53 ; PX1_8.3 162.55,43.41 ; PX1_8.3 162.55,41.66 ; PX2_15.4 17.45,98.33 ; PX2_15.4 16.58,97.45 ; PX2_15.4 17.45,96.58 ; PX2_15.4 18.33,97.45 ; PX4_2.4 23.42,37.45 ; PX4_2.4 22.55,38.33 ; PX4_2.4 21.67,37.45 ; PX4_2.4 22.55,36.58 ; 56.58,112.55 PX1_14.4 ; PX1_14.4 57.45,113.42 ; PX1_14.4 57.45,111.67 ; PX1_14.4 58.33,112.55 ; 122.53,131.67 PX3_12.5 ; PX3_12.5 123.41,132.55 ; PX3_12.5 122.53,133.42 ; PX3_12.5 121.66,132.55 ; PX3_4.4 62.55,8.33 ; PX3_4.4 63.42,7.45 ; PX3_4.4 61.67,7.45 ; PX3_4.4 62.55,6.58 ; 81.67,47.45 PX2_3.4 ; PX2_3.4 82.55,48.33 ; PX2_3.4 83.42,47.45 ; PX2_3.4 82.55,46.58 ; PX4_13.3 77.45,148.34 ; PX4_13.3 78.33,147.47 ; PX4_13.3 76.58,147.47 ; PX4_13.3 77.45,146.59 ; 137.47,121.67 PX1_9.3 ; PX1_9.3 136.59,122.55 ; PX1_9.3 138.34,122.55 ; PX1_9.3 137.47,123.42 ; PX1_3.3 83.42,72.53 ; PX1_3.3 81.67,72.53 ; PX1_3.3 82.55,71.66 ; PX1_3.3 82.55,73.41 ; 22.53,121.66 PX3_15.2 ; PX3_15.2 22.53,123.41 ; PX3_15.2 21.66,122.53 ; PX3_15.2 23.41,122.53 ; PX2_2.2 38.34,22.53 ; PX2_2.2 37.47,21.66 ; PX2_2.2 37.47,23.41 ; PX2_2.2 36.59,22.53 ; 122.53,146.59 PX4_11.2 ; PX4_11.2 121.66,147.47 ; PX4_11.2 123.41,147.47 ; PX4_11.2 122.53,148.34 ; 101.66,167.47 PX2_11.2 ; PX2_11.2 102.53,166.59 ; PX2_11.2 103.41,167.47 ; PX2_11.2 102.53,168.34 ; 16.58,142.55 PX1_16.4 ; PX1_16.4 17.45,143.42 ; PX1_16.4 18.33,142.55 ; PX1_16.4 17.45,141.67 ; 96.58,167.47 PX2_11.3 ; PX2_11.3 98.33,167.47 ; PX2_11.3 97.45,166.59 ; PX2_11.3 97.45,168.34 ; PX4_10.3 158.33,137.47 ; PX4_10.3 156.58,137.47 ; PX4_10.3 157.45,136.59 ; PX4_10.3 157.45,138.34 ; PX4_8.3 142.55,43.41 ; PX4_8.3 142.55,41.66 ; PX4_8.3 143.42,42.53 ; PX4_8.3 141.67,42.53 ; 97.47,31.66 PX4_5.2 ; PX4_5.2 97.47,33.41 ; PX4_5.2 96.59,32.53 ; PX4_5.2 98.34,32.53 ; 116.58,127.47 PX3_12.3 ; PX3_12.3 117.45,126.59 ; PX3_12.3 117.45,128.34 ; PX3_12.3 118.33,127.47 ; 101.67,27.45 PX4_5.4 ; PX4_5.4 102.55,26.58 ; PX4_5.4 102.55,28.33 ; PX4_5.4 103.42,27.45 ; PX1_3.5 78.34,67.45 ; PX1_3.5 77.47,68.33 ; PX1_3.5 77.47,66.58 ; PX1_3.5 76.59,67.45 ; PX1_13.5 62.53,153.42 ; PX1_13.5 63.41,152.55 ; PX1_13.5 61.66,152.55 ; PX1_13.5 62.53,151.67 ; 62.53,131.67 PX2_14.5 ; PX2_14.5 61.66,132.55 ; PX2_14.5 63.41,132.55 ; PX2_14.5 62.53,133.42 ; 82.53,111.67 PX4_14.5 ; PX4_14.5 82.53,113.42 ; PX4_14.5 81.66,112.55 ; PX4_14.5 83.41,112.55 ; 162.55,21.66 PX2_8.3 ; PX2_8.3 163.42,22.53 ; PX2_8.3 162.55,23.41 ; PX2_8.3 161.67,22.53 ; 142.55,61.67 PX4_7.4 ; PX4_7.4 143.42,62.55 ; PX4_7.4 142.55,63.42 ; PX4_7.4 141.67,62.55 ; 122.53,111.67 PX4_12.5 ; PX4_12.5 123.41,112.55 ; PX4_12.5 121.66,112.55 ; PX4_12.5 122.53,113.42 ; 56.58,127.47 PX2_14.3 ; PX2_14.3 57.45,126.59 ; PX2_14.3 58.33,127.47 ; PX2_14.3 57.45,128.34 ; PX4_1.4 38.33,77.45 ; PX4_1.4 37.45,76.58 ; PX4_1.4 36.58,77.45 ; PX4_1.4 37.45,78.33 ; 137.47,76.59 PX1_7.2 ; PX1_7.2 136.59,77.47 ; PX1_7.2 138.34,77.47 ; PX1_7.2 137.47,78.34 ; PX1_1.5 38.33,62.53 ; PX1_1.5 37.45,61.66 ; PX1_1.5 37.45,63.41 ; PX1_1.5 36.58,62.53 ; PX3_9.4 162.55,103.42 ; PX3_9.4 161.67,102.55 ; PX3_9.4 163.42,102.55 ; PX3_9.4 162.55,101.67 ; 56.59,27.45 PX4_4.5 ; PX4_4.5 58.34,27.45 ; PX4_4.5 57.47,28.33 ; PX4_4.5 57.47,26.58 ; 21.66,117.45 PX3_15.3 ; PX3_15.3 23.41,117.45 ; PX3_15.3 22.53,116.58 ; PX3_15.3 22.53,118.33 ; 81.66,172.55 PX3_13.5 ; PX3_13.5 83.41,172.55 ; PX3_13.5 82.53,173.42 ; PX3_13.5 82.53,171.67 ; 102.53,151.67 PX1_11.5 ; PX1_11.5 101.66,152.55 ; PX1_11.5 102.53,153.42 ; PX1_11.5 103.41,152.55 ; PX4_15.4 38.33,117.45 ; PX4_15.4 37.45,118.33 ; PX4_15.4 37.45,116.58 ; PX4_15.4 36.58,117.45 ; 41.67,17.45 PX2_2.4 ; PX2_2.4 42.55,16.58 ; PX2_2.4 43.42,17.45 ; PX2_2.4 42.55,18.33 ; 36.58,142.55 PX4_16.4 ; PX4_16.4 37.45,143.42 ; PX4_16.4 37.45,141.67 ; PX4_16.4 38.33,142.55 ; PX1_12.3 98.33,107.47 ; PX1_12.3 96.58,107.47 ; PX1_12.3 97.45,106.59 ; PX1_12.3 97.45,108.34 ; 41.66,97.45 PX1_15.3 ; PX1_15.3 42.53,98.33 ; PX1_15.3 43.41,97.45 ; PX1_15.3 42.53,96.58 ; PX1_5.3 123.42,32.53 ; PX1_5.3 122.55,33.41 ; PX1_5.3 122.55,31.66 ; PX1_5.3 121.67,32.53 ; 41.66,142.55 PX4_16.5 ; PX4_16.5 43.41,142.55 ; PX4_16.5 42.53,143.42 ; PX4_16.5 42.53,141.67 ; PX3_10.4 157.45,163.42 ; PX3_10.4 158.33,162.55 ; PX3_10.4 157.45,161.67 ; PX3_10.4 156.58,162.55 ; 141.67,17.45 PX3_8.4 ; PX3_8.4 142.55,18.33 ; PX3_8.4 142.55,16.58 ; PX3_8.4 143.42,17.45 ; PX3_10.5 162.53,163.42 ; PX3_10.5 162.53,161.67 ; PX3_10.5 163.41,162.55 ; PX3_10.5 161.66,162.55 ; PX4_11.3 117.45,148.34 ; PX4_11.3 116.58,147.47 ; PX4_11.3 117.45,146.59 ; PX4_11.3 118.33,147.47 ; 102.55,71.66 PX4_6.3 ; PX4_6.3 102.55,73.41 ; PX4_6.3 103.42,72.53 ; PX4_6.3 101.67,72.53 ; PX2_6.2 117.47,53.41 ; PX2_6.2 118.34,52.53 ; PX2_6.2 116.59,52.53 ; PX2_6.2 117.47,51.66 ; PX1_9.5 142.55,118.34 ; PX1_9.5 143.42,117.47 ; PX1_9.5 142.55,116.59 ; PX1_9.5 141.67,117.47 ; PX1_6.5 118.34,67.45 ; PX1_6.5 117.47,66.58 ; PX1_6.5 116.59,67.45 ; PX1_6.5 117.47,68.33 ; PX1_6.3 123.42,72.53 ; PX1_6.3 121.67,72.53 ; PX1_6.3 122.55,71.66 ; PX1_6.3 122.55,73.41 ; PX3_13.3 78.33,167.47 ; PX3_13.3 76.58,167.47 ; PX3_13.3 77.45,168.34 ; PX3_13.3 77.45,166.59 ; 117.47,26.58 PX1_5.5 ; PX1_5.5 117.47,28.33 ; PX1_5.5 118.34,27.45 ; PX1_5.5 116.59,27.45 ; PX1_11.3 97.45,148.34 ; PX1_11.3 98.33,147.47 ; PX1_11.3 96.58,147.47 ; PX1_11.3 97.45,146.59 ; PX1_1.3 43.41,57.45 ; PX1_1.3 41.66,57.45 ; PX1_1.3 42.53,56.58 ; PX1_1.3 42.53,58.33 ; 141.67,77.47 PX1_7.5 ; PX1_7.5 142.55,78.34 ; PX1_7.5 143.42,77.47 ; PX1_7.5 142.55,76.59 ; 96.59,67.45 PX4_6.5 ; PX4_6.5 97.47,66.58 ; PX4_6.5 98.34,67.45 ; PX4_6.5 97.47,68.33 ; 77.45,131.67 PX3_14.4 ; PX3_14.4 76.58,132.55 ; PX3_14.4 78.33,132.55 ; PX3_14.4 77.45,133.42 ; PX1_14.2 62.53,108.34 ; PX1_14.2 62.53,106.59 ; PX1_14.2 61.66,107.47 ; PX1_14.2 63.41,107.47 ; PX2_15.5 18.33,102.53 ; PX2_15.5 17.45,103.41 ; PX2_15.5 17.45,101.66 ; PX2_15.5 16.58,102.53 ; 22.53,56.58 PX2_1.3 ; PX2_1.3 21.66,57.45 ; PX2_1.3 22.53,58.33 ; PX2_1.3 23.41,57.45 ; PX3_15.5 18.33,122.53 ; PX3_15.5 17.45,121.66 ; PX3_15.5 17.45,123.41 ; PX3_15.5 16.58,122.53 ; PX4_1.3 42.53,78.33 ; PX4_1.3 43.41,77.45 ; PX4_1.3 41.66,77.45 ; PX4_1.3 42.53,76.58 ; 116.59,7.45 PX2_5.5 ; PX2_5.5 117.47,6.58 ; PX2_5.5 117.47,8.33 ; PX2_5.5 118.34,7.45 ; PX2_1.4 18.33,57.45 ; PX2_1.4 17.45,58.33 ; PX2_1.4 17.45,56.58 ; PX2_1.4 16.58,57.45 ; PX3_16.4 38.33,162.55 ; PX3_16.4 36.58,162.55 ; PX3_16.4 37.45,161.67 ; PX3_16.4 37.45,163.42 ; PX3_16.3 38.33,157.47 ; PX3_16.3 37.45,158.34 ; PX3_16.3 36.58,157.47 ; PX3_16.3 37.45,156.59 ; PX1_4.4 83.42,27.45 ; PX1_4.4 82.55,26.58 ; PX1_4.4 81.67,27.45 ; PX1_4.4 82.55,28.33 ; 101.67,67.45 PX4_6.4 ; PX4_6.4 102.55,66.58 ; PX4_6.4 103.42,67.45 ; PX4_6.4 102.55,68.33 ; PX2_15.2 23.41,102.53 ; PX2_15.2 22.53,101.66 ; PX2_15.2 22.53,103.41 ; PX2_15.2 21.66,102.53 ; PX3_14.3 77.45,128.34 ; PX3_14.3 78.33,127.47 ; PX3_14.3 77.45,126.59 ; PX3_14.3 76.58,127.47 ; 96.59,12.53 PX3_5.2 ; PX3_5.2 98.34,12.53 ; PX3_5.2 97.47,13.41 ; PX3_5.2 97.47,11.66 ; PX3_14.2 83.41,127.47 ; PX3_14.2 82.53,126.59 ; PX3_14.2 81.66,127.47 ; PX3_14.2 82.53,128.34 ; PX1_15.4 37.45,98.33 ; PX1_15.4 36.58,97.45 ; PX1_15.4 37.45,96.58 ; PX1_15.4 38.33,97.45 ; PX3_13.2 82.53,168.34 ; PX3_13.2 81.66,167.47 ; PX3_13.2 82.53,166.59 ; PX3_13.2 83.41,167.47 ; 137.47,56.59 PX4_7.2 ; PX4_7.2 137.47,58.34 ; PX4_7.2 136.59,57.47 ; PX4_7.2 138.34,57.47 ; 121.67,12.53 PX2_5.3 ; PX2_5.3 122.55,13.41 ; PX2_5.3 122.55,11.66 ; PX2_5.3 123.42,12.53 ; 141.66,142.55 PX1_10.5 ; PX1_10.5 142.53,143.42 ; PX1_10.5 143.41,142.55 ; PX1_10.5 142.53,141.67 ; PX3_7.2 157.47,58.34 ; PX3_7.2 157.47,56.59 ; PX3_7.2 158.34,57.47 ; PX3_7.2 156.59,57.47 ; PX1_16.5 22.53,143.42 ; PX1_16.5 22.53,141.67 ; PX1_16.5 23.41,142.55 ; PX1_16.5 21.66,142.55 ; PX3_15.4 18.33,117.45 ; PX3_15.4 17.45,116.58 ; PX3_15.4 17.45,118.33 ; PX3_15.4 16.58,117.45 ; 57.47,46.58 PX3_3.5 ; PX3_3.5 57.47,48.33 ; PX3_3.5 56.59,47.45 ; PX3_3.5 58.34,47.45 ; PX3_14.5 83.41,132.55 ; PX3_14.5 82.53,133.42 ; PX3_14.5 82.53,131.67 ; PX3_14.5 81.66,132.55 ; PX3_1.4 18.33,77.45 ; PX3_1.4 17.45,78.33 ; PX3_1.4 16.58,77.45 ; PX3_1.4 17.45,76.58 ; 162.55,81.67 PX2_7.4 ; PX2_7.4 161.67,82.55 ; PX2_7.4 162.55,83.42 ; PX2_7.4 163.42,82.55 ; PX3_1.3 22.53,78.33 ; PX3_1.3 21.66,77.45 ; PX3_1.3 22.53,76.58 ; PX3_1.3 23.41,77.45 ; PX4_15.5 37.45,123.41 ; PX4_15.5 36.58,122.53 ; PX4_15.5 37.45,121.66 ; PX4_15.5 38.33,122.53 ; 61.66,112.55 PX1_14.5 ; PX1_14.5 62.53,111.67 ; PX1_14.5 62.53,113.42 ; PX1_14.5 63.41,112.55 ; 62.55,26.58 PX4_4.4 ; PX4_4.4 63.42,27.45 ; PX4_4.4 62.55,28.33 ; PX4_4.4 61.67,27.45 ; 57.47,11.66 PX3_4.2 ; PX3_4.2 56.59,12.53 ; PX3_4.2 58.34,12.53 ; PX3_4.2 57.47,13.41 ; PX1_5.2 117.47,33.41 ; PX1_5.2 117.47,31.66 ; PX1_5.2 116.59,32.53 ; PX1_5.2 118.34,32.53 ; PX4_8.5 138.34,37.45 ; PX4_8.5 136.59,37.45 ; PX4_8.5 137.47,38.33 ; PX4_8.5 137.47,36.58 ; 102.53,106.59 PX1_12.2 ; PX1_12.2 103.41,107.47 ; PX1_12.2 102.53,108.34 ; PX1_12.2 101.66,107.47 ; PX2_2.5 38.34,17.45 ; PX2_2.5 37.47,18.33 ; PX2_2.5 36.59,17.45 ; PX2_2.5 37.47,16.58 ; 122.55,51.66 PX2_6.3 ; PX2_6.3 121.67,52.53 ; PX2_6.3 122.55,53.41 ; PX2_6.3 123.42,52.53 ; 162.55,96.59 PX3_9.5 ; PX3_9.5 163.42,97.47 ; PX3_9.5 162.55,98.34 ; PX3_9.5 161.67,97.47 ; PX4_14.3 78.33,107.47 ; PX4_14.3 77.45,106.59 ; PX4_14.3 76.58,107.47 ; PX4_14.3 77.45,108.34 ; PX4_13.5 83.41,152.55 ; PX4_13.5 82.53,151.67 ; PX4_13.5 81.66,152.55 ; PX4_13.5 82.53,153.42 ; 137.47,16.58 PX3_8.5 ; PX3_8.5 138.34,17.45 ; PX3_8.5 136.59,17.45 ; PX3_8.5 137.47,18.33 ; 136.59,82.55 PX1_7.3 ; PX1_7.3 138.34,82.55 ; PX1_7.3 137.47,81.67 ; PX1_7.3 137.47,83.42 ; PX3_8.2 137.47,23.41 ; PX3_8.2 138.34,22.53 ; PX3_8.2 136.59,22.53 ; PX3_8.2 137.47,21.66 ; PX4_13.4 78.33,152.55 ; PX4_13.4 77.45,153.42 ; PX4_13.4 76.58,152.55 ; PX4_13.4 77.45,151.67 ; PX1_1.2 43.41,62.53 ; PX1_1.2 42.53,63.41 ; PX1_1.2 41.66,62.53 ; PX1_1.2 42.53,61.66 ; 122.55,6.58 PX2_5.4 ; PX2_5.4 123.42,7.45 ; PX2_5.4 122.55,8.33 ; PX2_5.4 121.67,7.45 ; PX2_14.2 62.53,128.34 ; PX2_14.2 63.41,127.47 ; PX2_14.2 62.53,126.59 ; PX2_14.2 61.66,127.47 ; PX1_7.4 142.55,83.42 ; PX1_7.4 142.55,81.67 ; PX1_7.4 141.67,82.55 ; PX1_7.4 143.42,82.55 ; 157.47,121.67 PX2_9.3 ; PX2_9.3 157.47,123.42 ; PX2_9.3 156.59,122.55 ; PX2_9.3 158.34,122.55 ; PX2_13.4 58.33,172.55 ; PX2_13.4 57.45,171.67 ; PX2_13.4 56.58,172.55 ; PX2_13.4 57.45,173.42 ; 97.45,131.67 PX2_12.4 ; PX2_12.4 97.45,133.42 ; PX2_12.4 96.58,132.55 ; PX2_12.4 98.33,132.55 ; PX2_6.5 117.47,48.33 ; PX2_6.5 118.34,47.45 ; PX2_6.5 116.59,47.45 ; PX2_6.5 117.47,46.58 ; PX3_2.4 23.42,17.45 ; PX3_2.4 21.67,17.45 ; PX3_2.4 22.55,16.58 ; PX3_2.4 22.55,18.33 ; 142.53,156.59 PX2_10.2 ; PX2_10.2 142.53,158.34 ; PX2_10.2 143.41,157.47 ; PX2_10.2 141.66,157.47 ; 142.55,121.67 PX1_9.4 ; PX1_9.4 143.42,122.55 ; PX1_9.4 141.67,122.55 ; PX1_9.4 142.55,123.42 ; 101.66,132.55 PX2_12.5 ; PX2_12.5 102.53,131.67 ; PX2_12.5 102.53,133.42 ; PX2_12.5 103.41,132.55 ; 56.59,32.53 PX4_4.2 ; PX4_4.2 58.34,32.53 ; PX4_4.2 57.47,31.66 ; PX4_4.2 57.47,33.41 ; PX2_1.5 17.45,63.41 ; PX2_1.5 18.33,62.53 ; PX2_1.5 17.45,61.66 ; PX2_1.5 16.58,62.53 ; PX3_13.4 77.45,173.42 ; PX3_13.4 76.58,172.55 ; PX3_13.4 77.45,171.67 ; PX3_13.4 78.33,172.55 ; PX3_6.5 97.47,48.33 ; PX3_6.5 97.47,46.58 ; PX3_6.5 98.34,47.45 ; PX3_6.5 96.59,47.45 ; 142.53,161.67 PX2_10.5 ; PX2_10.5 142.53,163.42 ; PX2_10.5 143.41,162.55 ; PX2_10.5 141.66,162.55 ; PX1_10.4 138.33,142.55 ; PX1_10.4 137.45,141.67 ; PX1_10.4 137.45,143.42 ; PX1_10.4 136.58,142.55 ; 96.59,27.45 PX4_5.5 ; PX4_5.5 97.47,28.33 ; PX4_5.5 98.34,27.45 ; PX4_5.5 97.47,26.58 ; 62.55,46.58 PX3_3.4 ; PX3_3.4 61.67,47.45 ; PX3_3.4 62.55,48.33 ; PX3_3.4 63.42,47.45 ; 122.53,166.59 PX3_11.2 ; PX3_11.2 123.41,167.47 ; PX3_11.2 121.66,167.47 ; PX3_11.2 122.53,168.34 ; PX1_10.3 137.45,138.34 ; PX1_10.3 137.45,136.59 ; PX1_10.3 136.58,137.47 ; PX1_10.3 138.33,137.47 ; 96.58,172.55 PX2_11.4 ; PX2_11.4 98.33,172.55 ; PX2_11.4 97.45,171.67 ; PX2_11.4 97.45,173.42 ; 42.53,116.58 PX4_15.3 ; PX4_15.3 43.41,117.45 ; PX4_15.3 42.53,118.33 ; PX4_15.3 41.66,117.45 ; PX4_4.3 63.42,32.53 ; PX4_4.3 62.55,31.66 ; PX4_4.3 62.55,33.41 ; PX4_4.3 61.67,32.53 ; 56.59,72.53 PX4_3.2 ; PX4_3.2 58.34,72.53 ; PX4_3.2 57.47,71.66 ; PX4_3.2 57.47,73.41 ; PX4_7.5 142.55,58.34 ; PX4_7.5 141.67,57.47 ; PX4_7.5 143.42,57.47 ; PX4_7.5 142.55,56.59 ; PX4_15.2 43.41,122.53 ; PX4_15.2 42.53,123.41 ; PX4_15.2 41.66,122.53 ; PX4_15.2 42.53,121.66 ; PX2_1.2 22.53,63.41 ; PX2_1.2 21.66,62.53 ; PX2_1.2 22.53,61.66 ; PX2_1.2 23.41,62.53 ; PX1_10.2 142.53,138.34 ; PX1_10.2 143.41,137.47 ; PX1_10.2 142.53,136.59 ; PX1_10.2 141.66,137.47 ; PX1_3.4 83.42,67.45 ; PX1_3.4 82.55,66.58 ; PX1_3.4 81.67,67.45 ; PX1_3.4 82.55,68.33 ; PX3_11.3 118.33,167.47 ; PX3_11.3 117.45,166.59 ; PX3_11.3 117.45,168.34 ; PX3_11.3 116.58,167.47 ; 62.55,51.66 PX3_3.3 ; PX3_3.3 63.42,52.53 ; PX3_3.3 61.67,52.53 ; PX3_3.3 62.55,53.41 ; PX3_7.3 158.34,62.55 ; PX3_7.3 156.59,62.55 ; PX3_7.3 157.47,61.67 ; PX3_7.3 157.47,63.42 ; 117.45,131.67 PX3_12.4 ; PX3_12.4 118.33,132.55 ; PX3_12.4 117.45,133.42 ; PX3_12.4 116.58,132.55 ; PX4_9.2 137.47,98.34 ; PX4_9.2 136.59,97.47 ; PX4_9.2 137.47,96.59 ; PX4_9.2 138.34,97.47 ; PX4_12.2 122.53,108.34 ; PX4_12.2 122.53,106.59 ; PX4_12.2 123.41,107.47 ; PX4_12.2 121.66,107.47 ; 117.47,11.66 PX2_5.2 ; PX2_5.2 117.47,13.41 ; PX2_5.2 116.59,12.53 ; PX2_5.2 118.34,12.53 ; 56.58,107.47 PX1_14.3 ; PX1_14.3 58.33,107.47 ; PX1_14.3 57.45,106.59 ; PX1_14.3 57.45,108.34 ; PX1_2.4 43.42,37.45 ; PX1_2.4 41.67,37.45 ; PX1_2.4 42.55,38.33 ; PX1_2.4 42.55,36.58 ; 117.45,106.59 PX4_12.3 ; PX4_12.3 117.45,108.34 ; PX4_12.3 118.33,107.47 ; PX4_12.3 116.58,107.47 ; PX4_2.5 17.47,38.33 ; PX4_2.5 17.47,36.58 ; PX4_2.5 18.34,37.45 ; PX4_2.5 16.59,37.45 ; 122.55,46.58 PX2_6.4 ; PX2_6.4 122.55,48.33 ; PX2_6.4 121.67,47.45 ; PX2_6.4 123.42,47.45 ; PX2_13.5 62.53,173.42 ; PX2_13.5 63.41,172.55 ; PX2_13.5 61.66,172.55 ; PX2_13.5 62.53,171.67 ; PX2_4.2 77.47,13.41 ; PX2_4.2 77.47,11.66 ; PX2_4.2 78.34,12.53 ; PX2_4.2 76.59,12.53 ; 141.67,97.47 PX4_9.5 ; PX4_9.5 142.55,98.34 ; PX4_9.5 142.55,96.59 ; PX4_9.5 143.42,97.47 ; PX2_12.3 97.45,128.34 ; PX2_12.3 97.45,126.59 ; PX2_12.3 96.58,127.47 ; PX2_12.3 98.33,127.47 ; PX4_11.5 123.41,152.55 ; PX4_11.5 122.53,153.42 ; PX4_11.5 122.53,151.67 ; PX4_11.5 121.66,152.55 ; PX4_8.4 143.42,37.45 ; PX4_8.4 142.55,38.33 ; PX4_8.4 141.67,37.45 ; PX4_8.4 142.55,36.58 ; PX2_4.4 82.55,8.33 ; PX2_4.4 83.42,7.45 ; PX2_4.4 81.67,7.45 ; PX2_4.4 82.55,6.58 ; PX3_4.5 57.47,8.33 ; PX3_4.5 57.47,6.58 ; PX3_4.5 56.59,7.45 ; PX3_4.5 58.34,7.45 ; PX2_9.4 163.42,122.55 ; PX2_9.4 162.55,121.67 ; PX2_9.4 162.55,123.42 ; PX2_9.4 161.67,122.55 ; 22.53,136.59 PX1_16.2 ; PX1_16.2 21.66,137.47 ; PX1_16.2 23.41,137.47 ; PX1_16.2 22.53,138.34 ; 82.55,51.66 PX2_3.3 ; PX2_3.3 83.42,52.53 ; PX2_3.3 81.67,52.53 ; PX2_3.3 82.55,53.41 ; PX4_14.4 77.45,113.42 ; PX4_14.4 77.45,111.67 ; PX4_14.4 76.58,112.55 ; PX4_14.4 78.33,112.55 ; 81.67,12.53 PX2_4.3 ; PX2_4.3 82.55,13.41 ; PX2_4.3 83.42,12.53 ; PX2_4.3 82.55,11.66 ; PX1_4.2 77.47,33.41 ; PX1_4.2 78.34,32.53 ; PX1_4.2 76.59,32.53 ; PX1_4.2 77.47,31.66 ; PX4_8.2 138.34,42.53 ; PX4_8.2 137.47,43.41 ; PX4_8.2 137.47,41.66 ; PX4_8.2 136.59,42.53 ; 162.55,76.59 PX2_7.5 ; PX2_7.5 162.55,78.34 ; PX2_7.5 161.67,77.47 ; PX2_7.5 163.42,77.47 ; PX4_1.2 42.53,83.41 ; PX4_1.2 43.41,82.53 ; PX4_1.2 42.53,81.66 ; PX4_1.2 41.66,82.53 ; PX4_1.5 38.33,82.53 ; PX4_1.5 37.45,83.41 ; PX4_1.5 36.58,82.53 ; PX4_1.5 37.45,81.66 ; PX3_12.2 122.53,128.34 ; PX3_12.2 123.41,127.47 ; PX3_12.2 122.53,126.59 ; PX3_12.2 121.66,127.47 ; PX3_5.4 102.55,8.33 ; PX3_5.4 101.67,7.45 ; PX3_5.4 103.42,7.45 ; PX3_5.4 102.55,6.58 ; 81.66,107.47 PX4_14.2 ; PX4_14.2 82.53,108.34 ; PX4_14.2 83.41,107.47 ; PX4_14.2 82.53,106.59 ; 162.55,16.58 PX2_8.4 ; PX2_8.4 161.67,17.45 ; PX2_8.4 163.42,17.45 ; PX2_8.4 162.55,18.33 ; PX1_12.5 102.53,113.42 ; PX1_12.5 101.66,112.55 ; PX1_12.5 103.41,112.55 ; PX1_12.5 102.53,111.67 ; PX4_11.4 118.33,152.55 ; PX4_11.4 117.45,151.67 ; PX4_11.4 117.45,153.42 ; PX4_11.4 116.58,152.55 ; PX1_2.5 37.47,38.33 ; PX1_2.5 38.34,37.45 ; PX1_2.5 37.47,36.58 ; PX1_2.5 36.59,37.45 ; PX4_16.2 43.41,137.47 ; PX4_16.2 42.53,138.34 ; PX4_16.2 42.53,136.59 ; PX4_16.2 41.66,137.47 ; 157.47,101.67 PX3_9.3 ; PX3_9.3 157.47,103.42 ; PX3_9.3 158.34,102.55 ; PX3_9.3 156.59,102.55 ; PX2_10.4 137.45,163.42 ; PX2_10.4 136.58,162.55 ; PX2_10.4 138.33,162.55 ; PX2_10.4 137.45,161.67 ; PX3_11.4 117.45,173.42 ; PX3_11.4 117.45,171.67 ; PX3_11.4 118.33,172.55 ; PX3_11.4 116.58,172.55 ; PX3_2.2 18.34,22.53 ; PX3_2.2 17.47,21.66 ; PX3_2.2 16.59,22.53 ; PX3_2.2 17.47,23.41 ; 57.45,146.59 PX1_13.3 ; PX1_13.3 58.33,147.47 ; PX1_13.3 57.45,148.34 ; PX1_13.3 56.58,147.47 ; PX1_6.2 118.34,72.53 ; PX1_6.2 116.59,72.53 ; PX1_6.2 117.47,73.41 ; PX1_6.2 117.47,71.66 ; PX2_13.2 63.41,167.47 ; PX2_13.2 62.53,166.59 ; PX2_13.2 61.66,167.47 ; PX2_13.2 62.53,168.34 ; 157.47,81.67 PX2_7.3 ; PX2_7.3 156.59,82.55 ; PX2_7.3 158.34,82.55 ; PX2_7.3 157.47,83.42 ; 76.59,72.53 PX1_3.2 ; PX1_3.2 78.34,72.53 ; PX1_3.2 77.47,73.41 ; PX1_3.2 77.47,71.66 ; PX3_9.2 158.34,97.47 ; PX3_9.2 156.59,97.47 ; PX3_9.2 157.47,96.59 ; PX3_9.2 157.47,98.34 ; PX3_5.5 98.34,7.45 ; PX3_5.5 97.47,8.33 ; PX3_5.5 96.59,7.45 ; PX3_5.5 97.47,6.58 ; PX3_4.3 62.55,13.41 ; PX3_4.3 62.55,11.66 ; PX3_4.3 63.42,12.53 ; PX3_4.3 61.67,12.53 ; 21.67,22.53 PX3_2.3 ; PX3_2.3 22.55,21.66 ; PX3_2.3 22.55,23.41 ; PX3_2.3 23.42,22.53 ; 56.58,152.55 PX1_13.4 ; PX1_13.4 57.45,151.67 ; PX1_13.4 58.33,152.55 ; PX1_13.4 57.45,153.42 ; 157.47,41.66 PX1_8.2 ; PX1_8.2 157.47,43.41 ; PX1_8.2 158.34,42.53 ; PX1_8.2 156.59,42.53 ; 162.53,156.59 PX3_10.2 ; PX3_10.2 161.66,157.47 ; PX3_10.2 163.41,157.47 ; PX3_10.2 162.53,158.34 ; PX3_16.5 42.53,163.42 ; PX3_16.5 43.41,162.55 ; PX3_16.5 41.66,162.55 ; PX3_16.5 42.53,161.67 ; 101.66,127.47 PX2_12.2 ; PX2_12.2 102.53,128.34 ; PX2_12.2 102.53,126.59 ; PX2_12.2 103.41,127.47 ; 156.59,37.45 PX1_8.5 ; PX1_8.5 157.47,38.33 ; PX1_8.5 158.34,37.45 ; PX1_8.5 157.47,36.58 ; PX2_9.5 163.42,117.47 ; PX2_9.5 162.55,118.34 ; PX2_9.5 161.67,117.47 ; PX2_9.5 162.55,116.59 ; 161.67,57.47 PX3_7.5 ; PX3_7.5 162.55,56.59 ; PX3_7.5 163.42,57.47 ; PX3_7.5 162.55,58.34 ; 122.53,171.67 PX3_11.5 ; PX3_11.5 122.53,173.42 ; PX3_11.5 121.66,172.55 ; PX3_11.5 123.41,172.55 ; 37.47,41.66 PX1_2.2 ; PX1_2.2 38.34,42.53 ; PX1_2.2 36.59,42.53 ; PX1_2.2 37.47,43.41 ; PX2_3.2 78.34,52.53 ; PX2_3.2 76.59,52.53 ; PX2_3.2 77.47,53.41 ; PX2_3.2 77.47,51.66 ; PX3_1.5 18.33,82.53 ; PX3_1.5 17.45,83.41 ; PX3_1.5 17.45,81.66 ; PX3_1.5 16.58,82.53 ; 56.59,52.53 PX3_3.2 ; PX3_3.2 57.47,51.66 ; PX3_3.2 58.34,52.53 ; PX3_3.2 57.47,53.41 ; PX3_7.4 163.42,62.55 ; PX3_7.4 161.67,62.55 ; PX3_7.4 162.55,61.67 ; PX3_7.4 162.55,63.42 ; 61.67,67.45 PX4_3.4 ; PX4_3.4 62.55,68.33 ; PX4_3.4 62.55,66.58 ; PX4_3.4 63.42,67.45 ; 22.53,81.66 PX3_1.2 ; PX3_1.2 21.66,82.53 ; PX3_1.2 23.41,82.53 ; PX3_1.2 22.53,83.41 ; 37.45,136.59 PX4_16.3 ; PX4_16.3 37.45,138.34 ; PX4_16.3 38.33,137.47 ; PX4_16.3 36.58,137.47 ; 61.66,147.47 PX1_13.2 ; PX1_13.2 62.53,148.34 ; PX1_13.2 63.41,147.47 ; PX1_13.2 62.53,146.59 ; PX1_4.3 82.55,33.41 ; PX1_4.3 83.42,32.53 ; PX1_4.3 82.55,31.66 ; PX1_4.3 81.67,32.53 ; 156.58,157.47 PX3_10.3 ; PX3_10.3 157.45,158.34 ; PX3_10.3 158.33,157.47 ; PX3_10.3 157.45,156.59 ; 97.47,71.66 PX4_6.2 ; PX4_6.2 98.34,72.53 ; PX4_6.2 96.59,72.53 ; PX4_6.2 97.47,73.41 ; PX3_6.2 98.34,52.53 ; PX3_6.2 97.47,51.66 ; PX3_6.2 96.59,52.53 ; PX3_6.2 97.47,53.41 ; PX2_16.2 22.53,158.34 ; PX2_16.2 22.53,156.59 ; PX2_16.2 21.66,157.47 ; PX2_16.2 23.41,157.47
  vias: v1(61.74,90.95) v1(61.74,89.05) v1(99.84,90.95) v1(99.84,89.05) v1(118.89,91.15) v1(118.89,88.85)
